# Altium PCB UM_10.PcbDoc (part 1 of 3)
Units mil, origin at the board's own origin, x right, y up, seen from the top; angles counter-clockwise.
Board outline 3937.01 x 3937.01 mil, 4 copper layers (Top, GND_02, PWR_03, Bottom), stack 35.4 mil thick; 347 components, 178 nets, 1059 pads, 909 vias.
Unrouted connection lines stored in the file: 2.
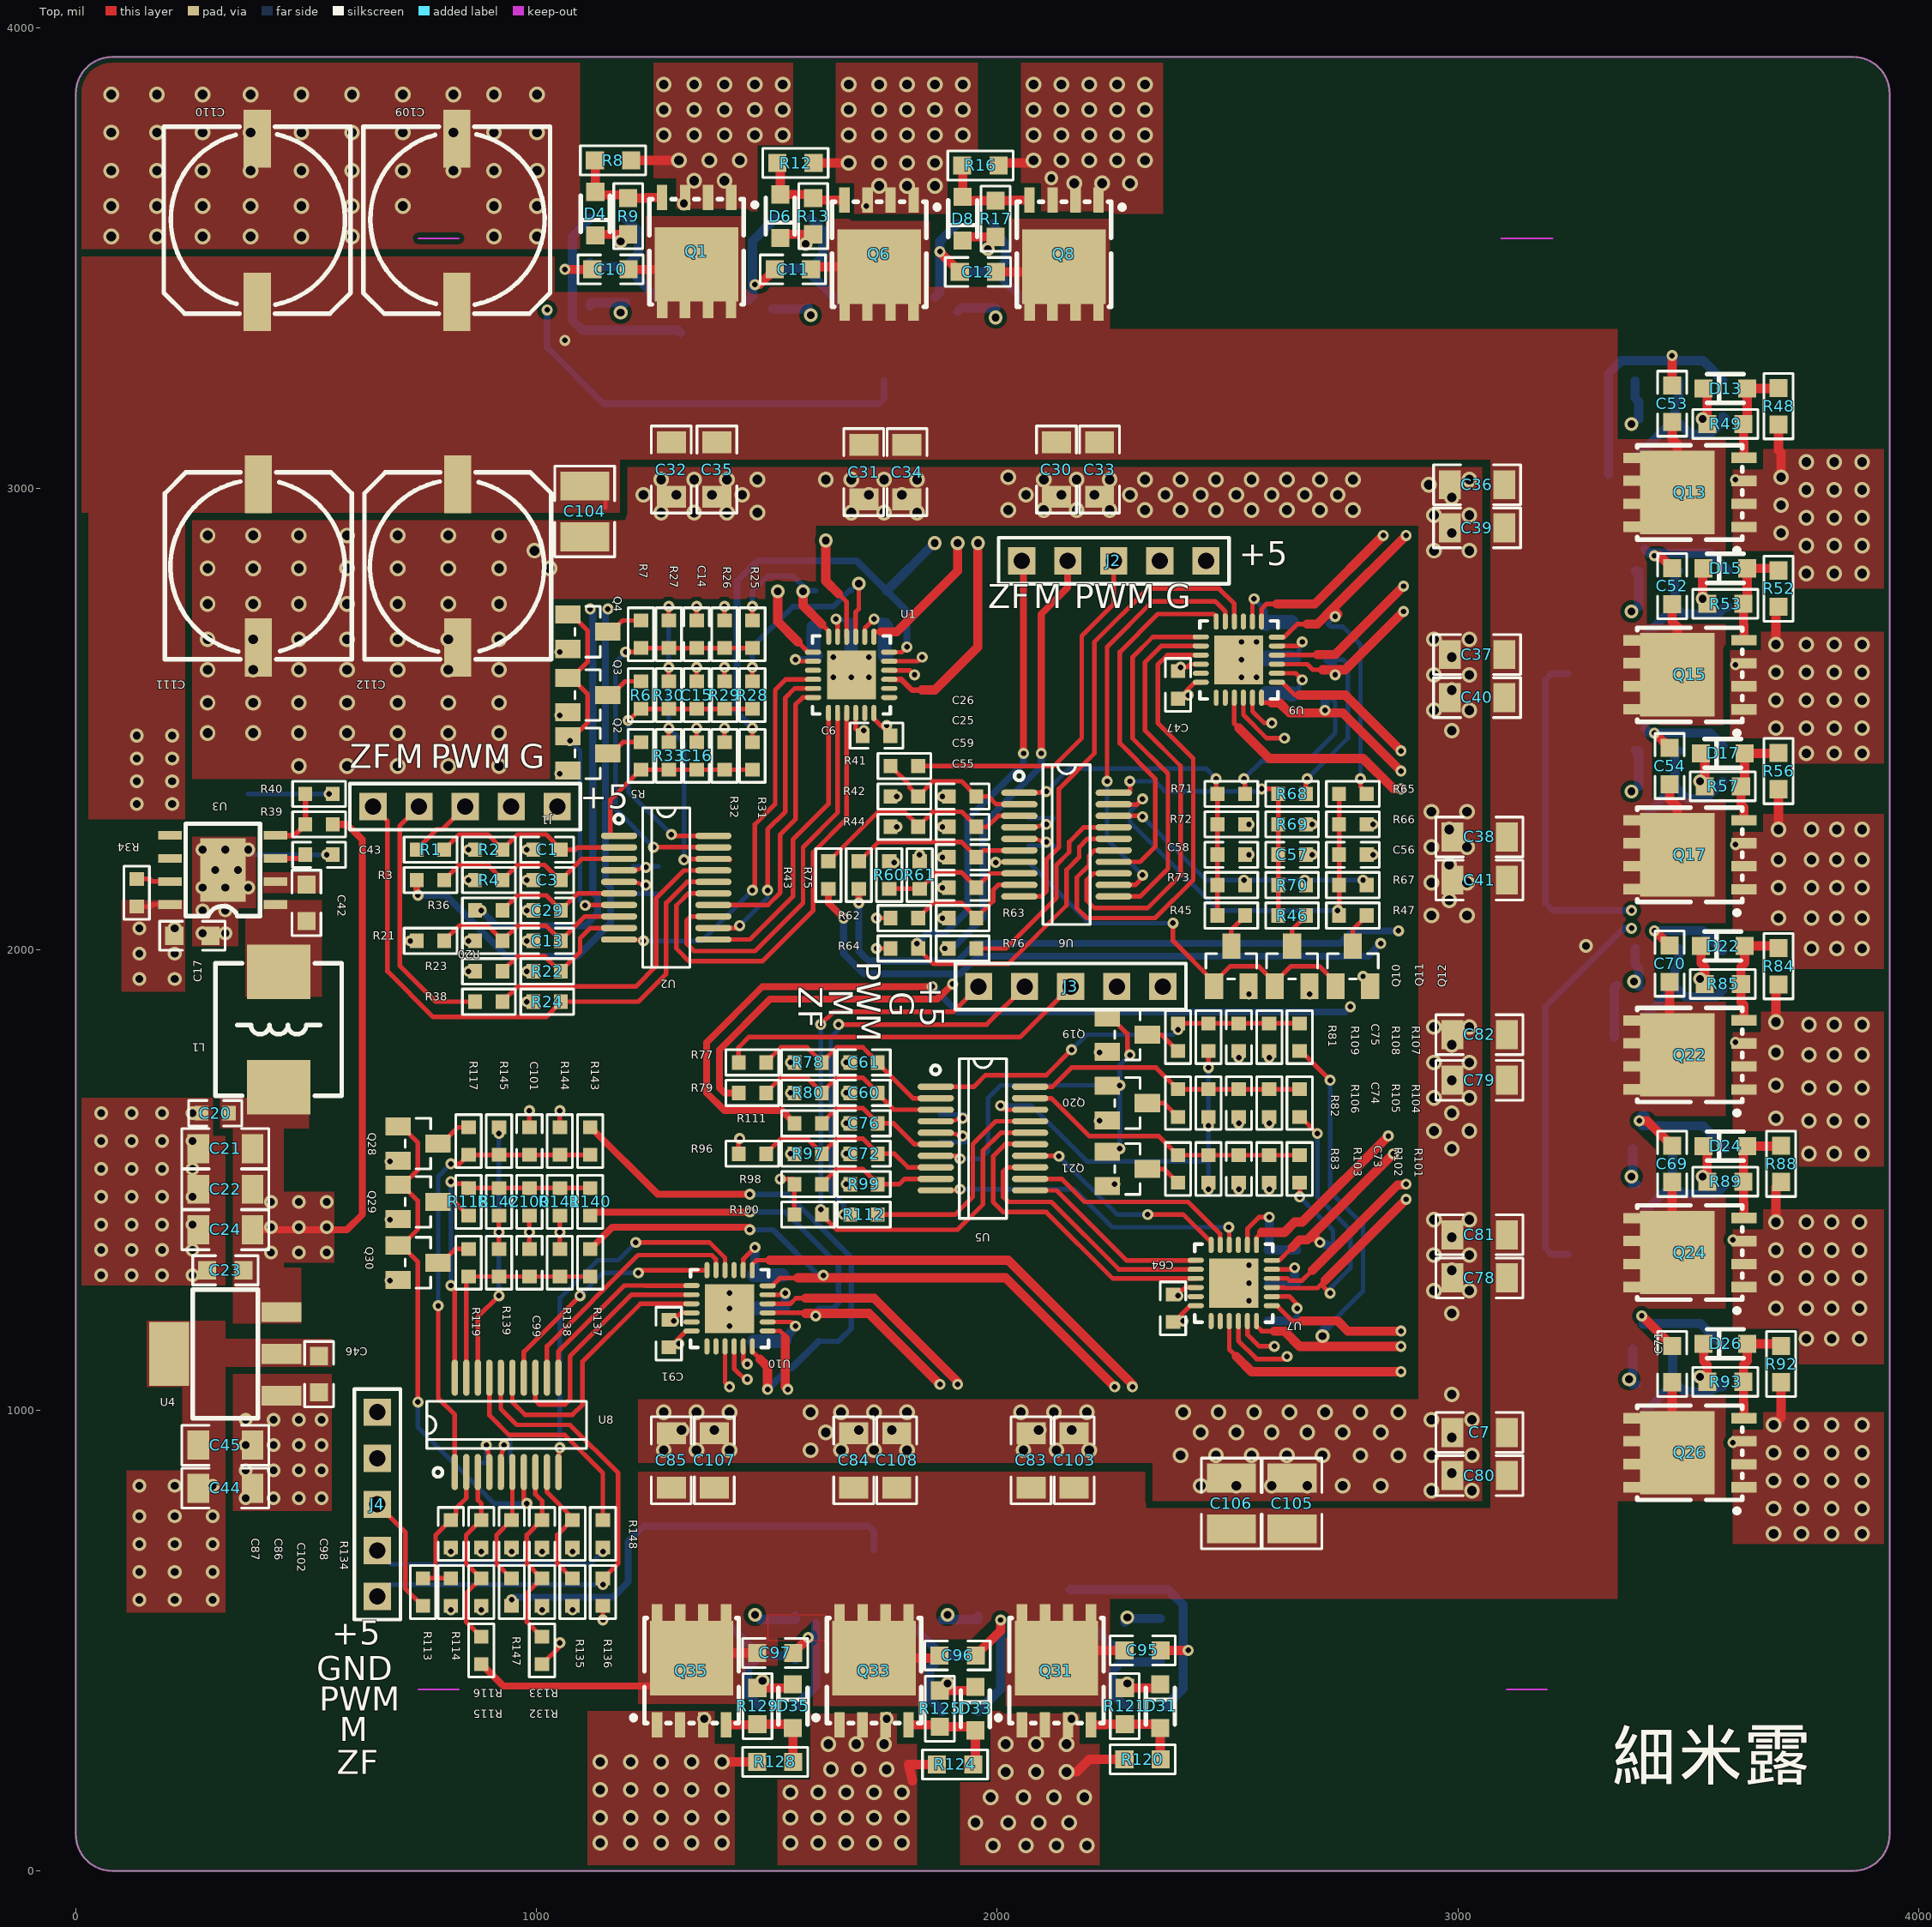
[diagram p0: Top view]
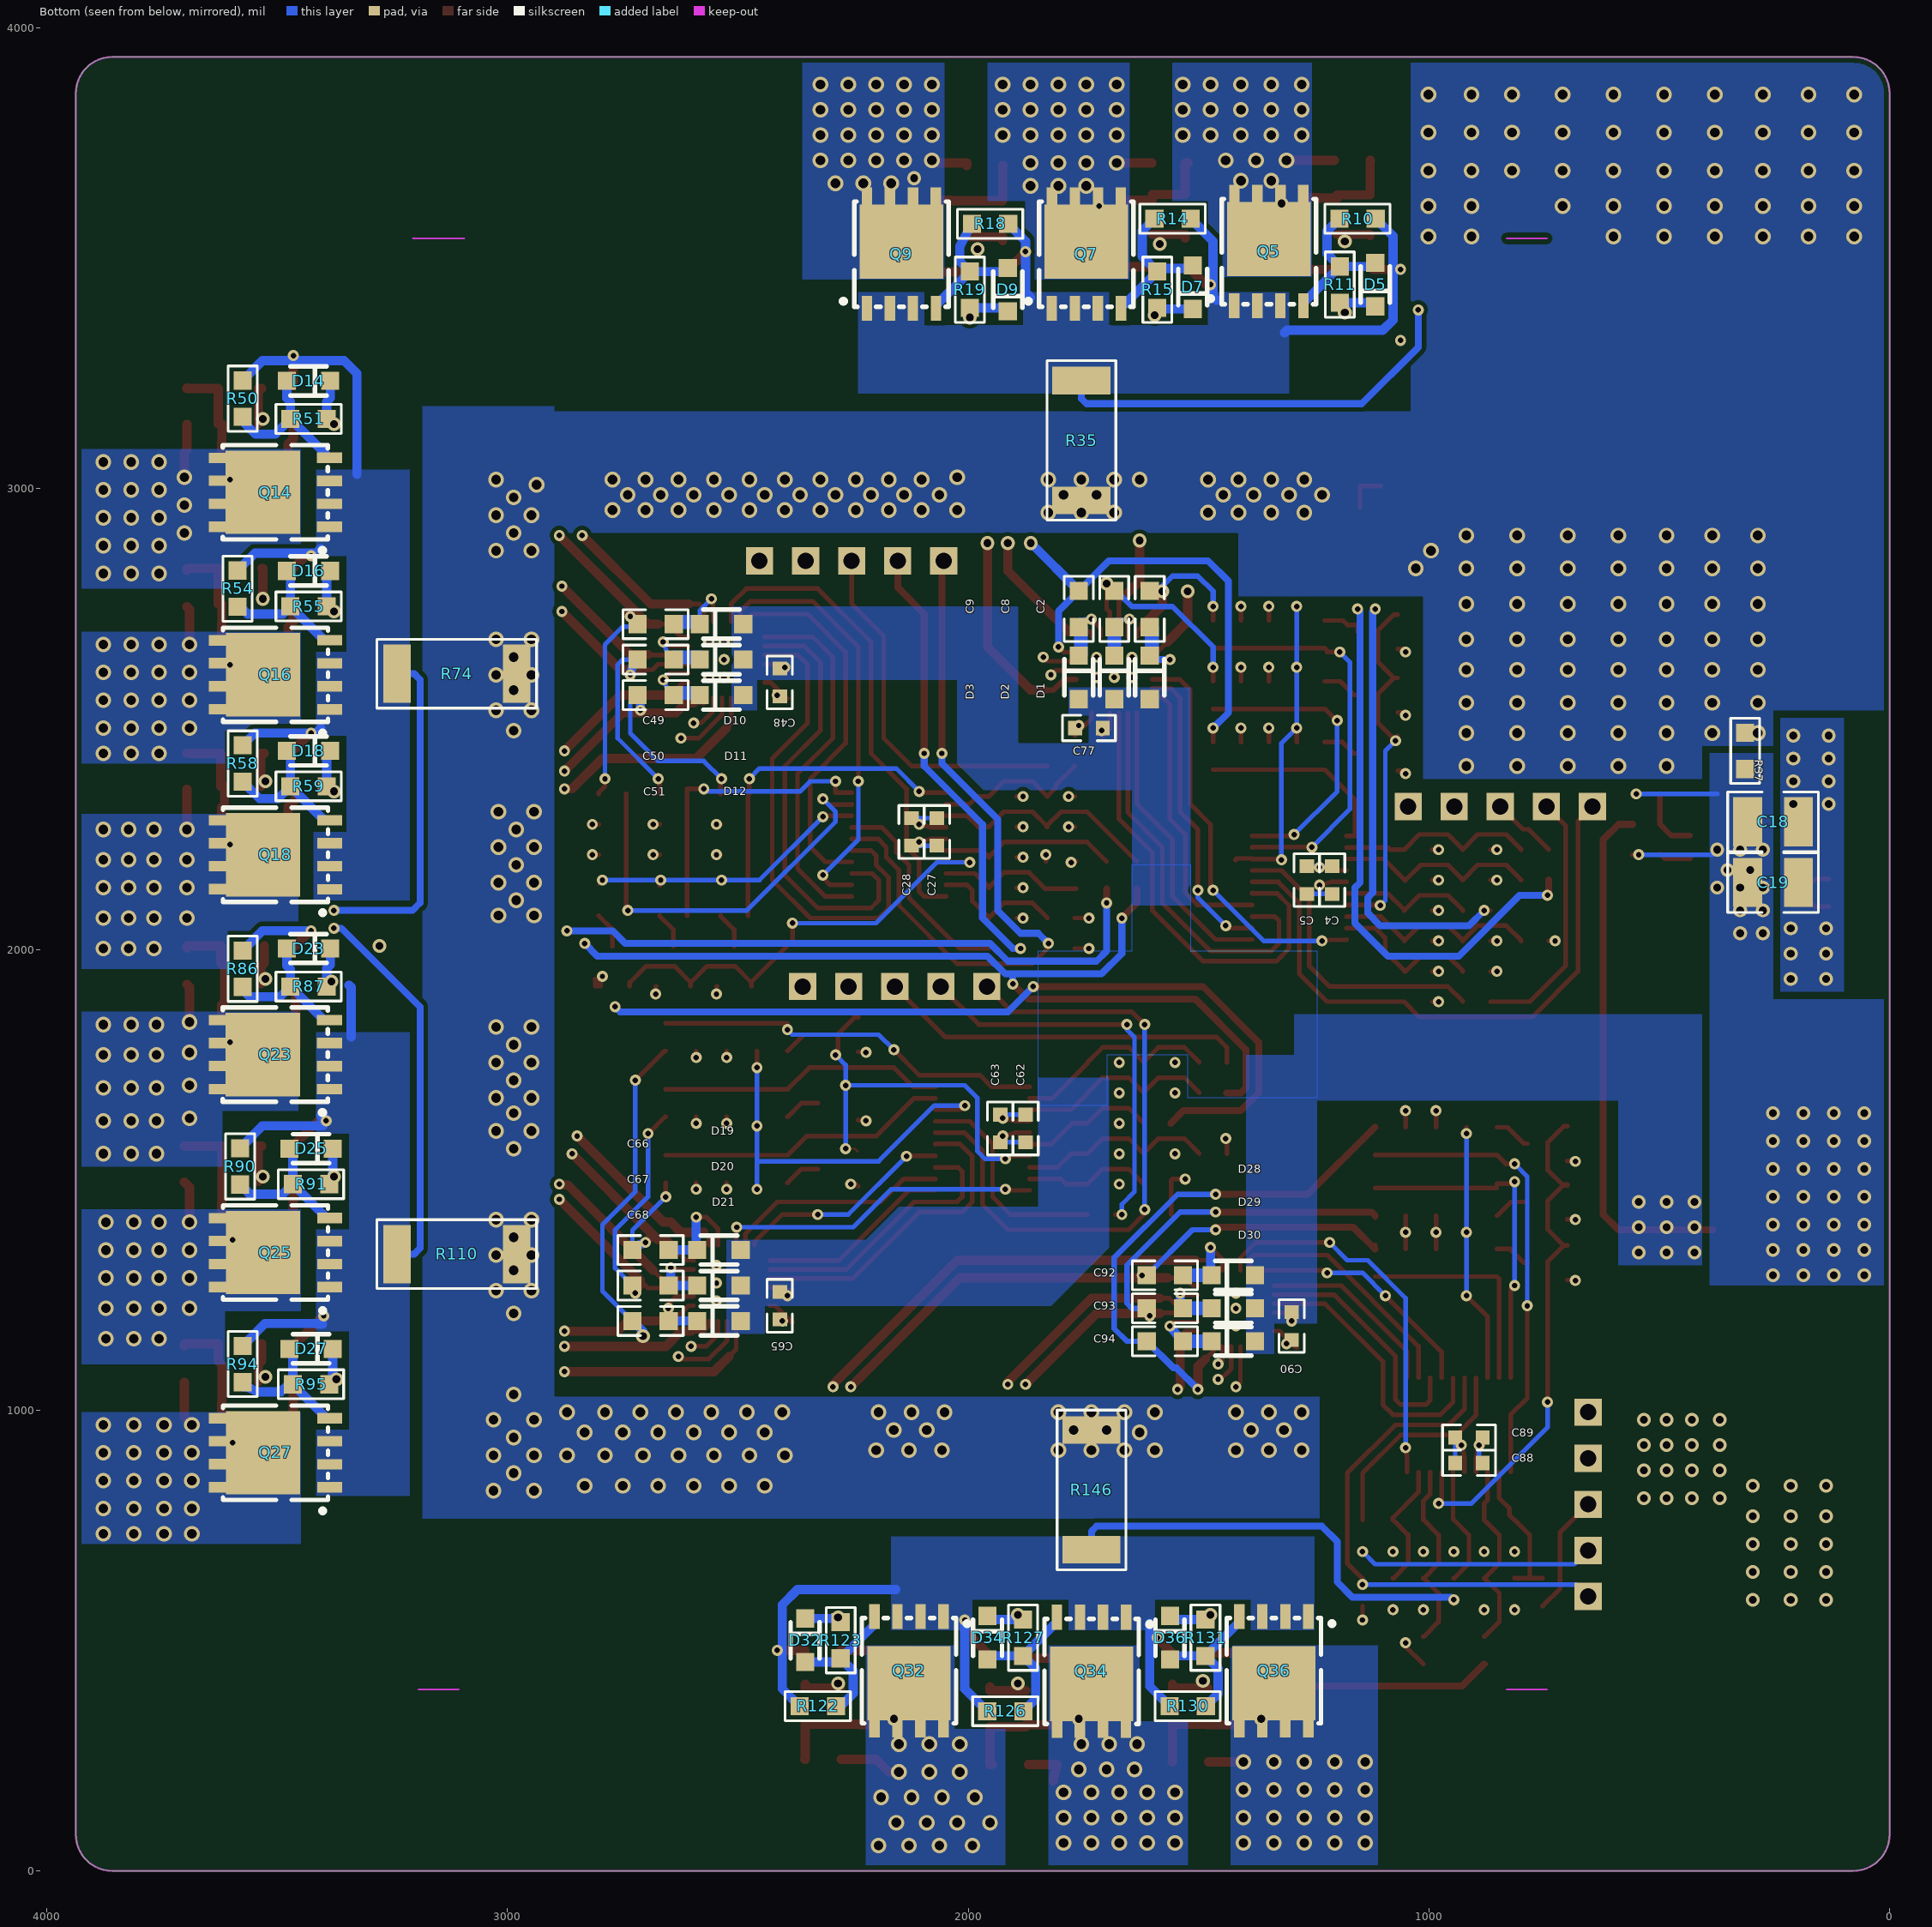
[diagram p1: Bottom view, seen from below]
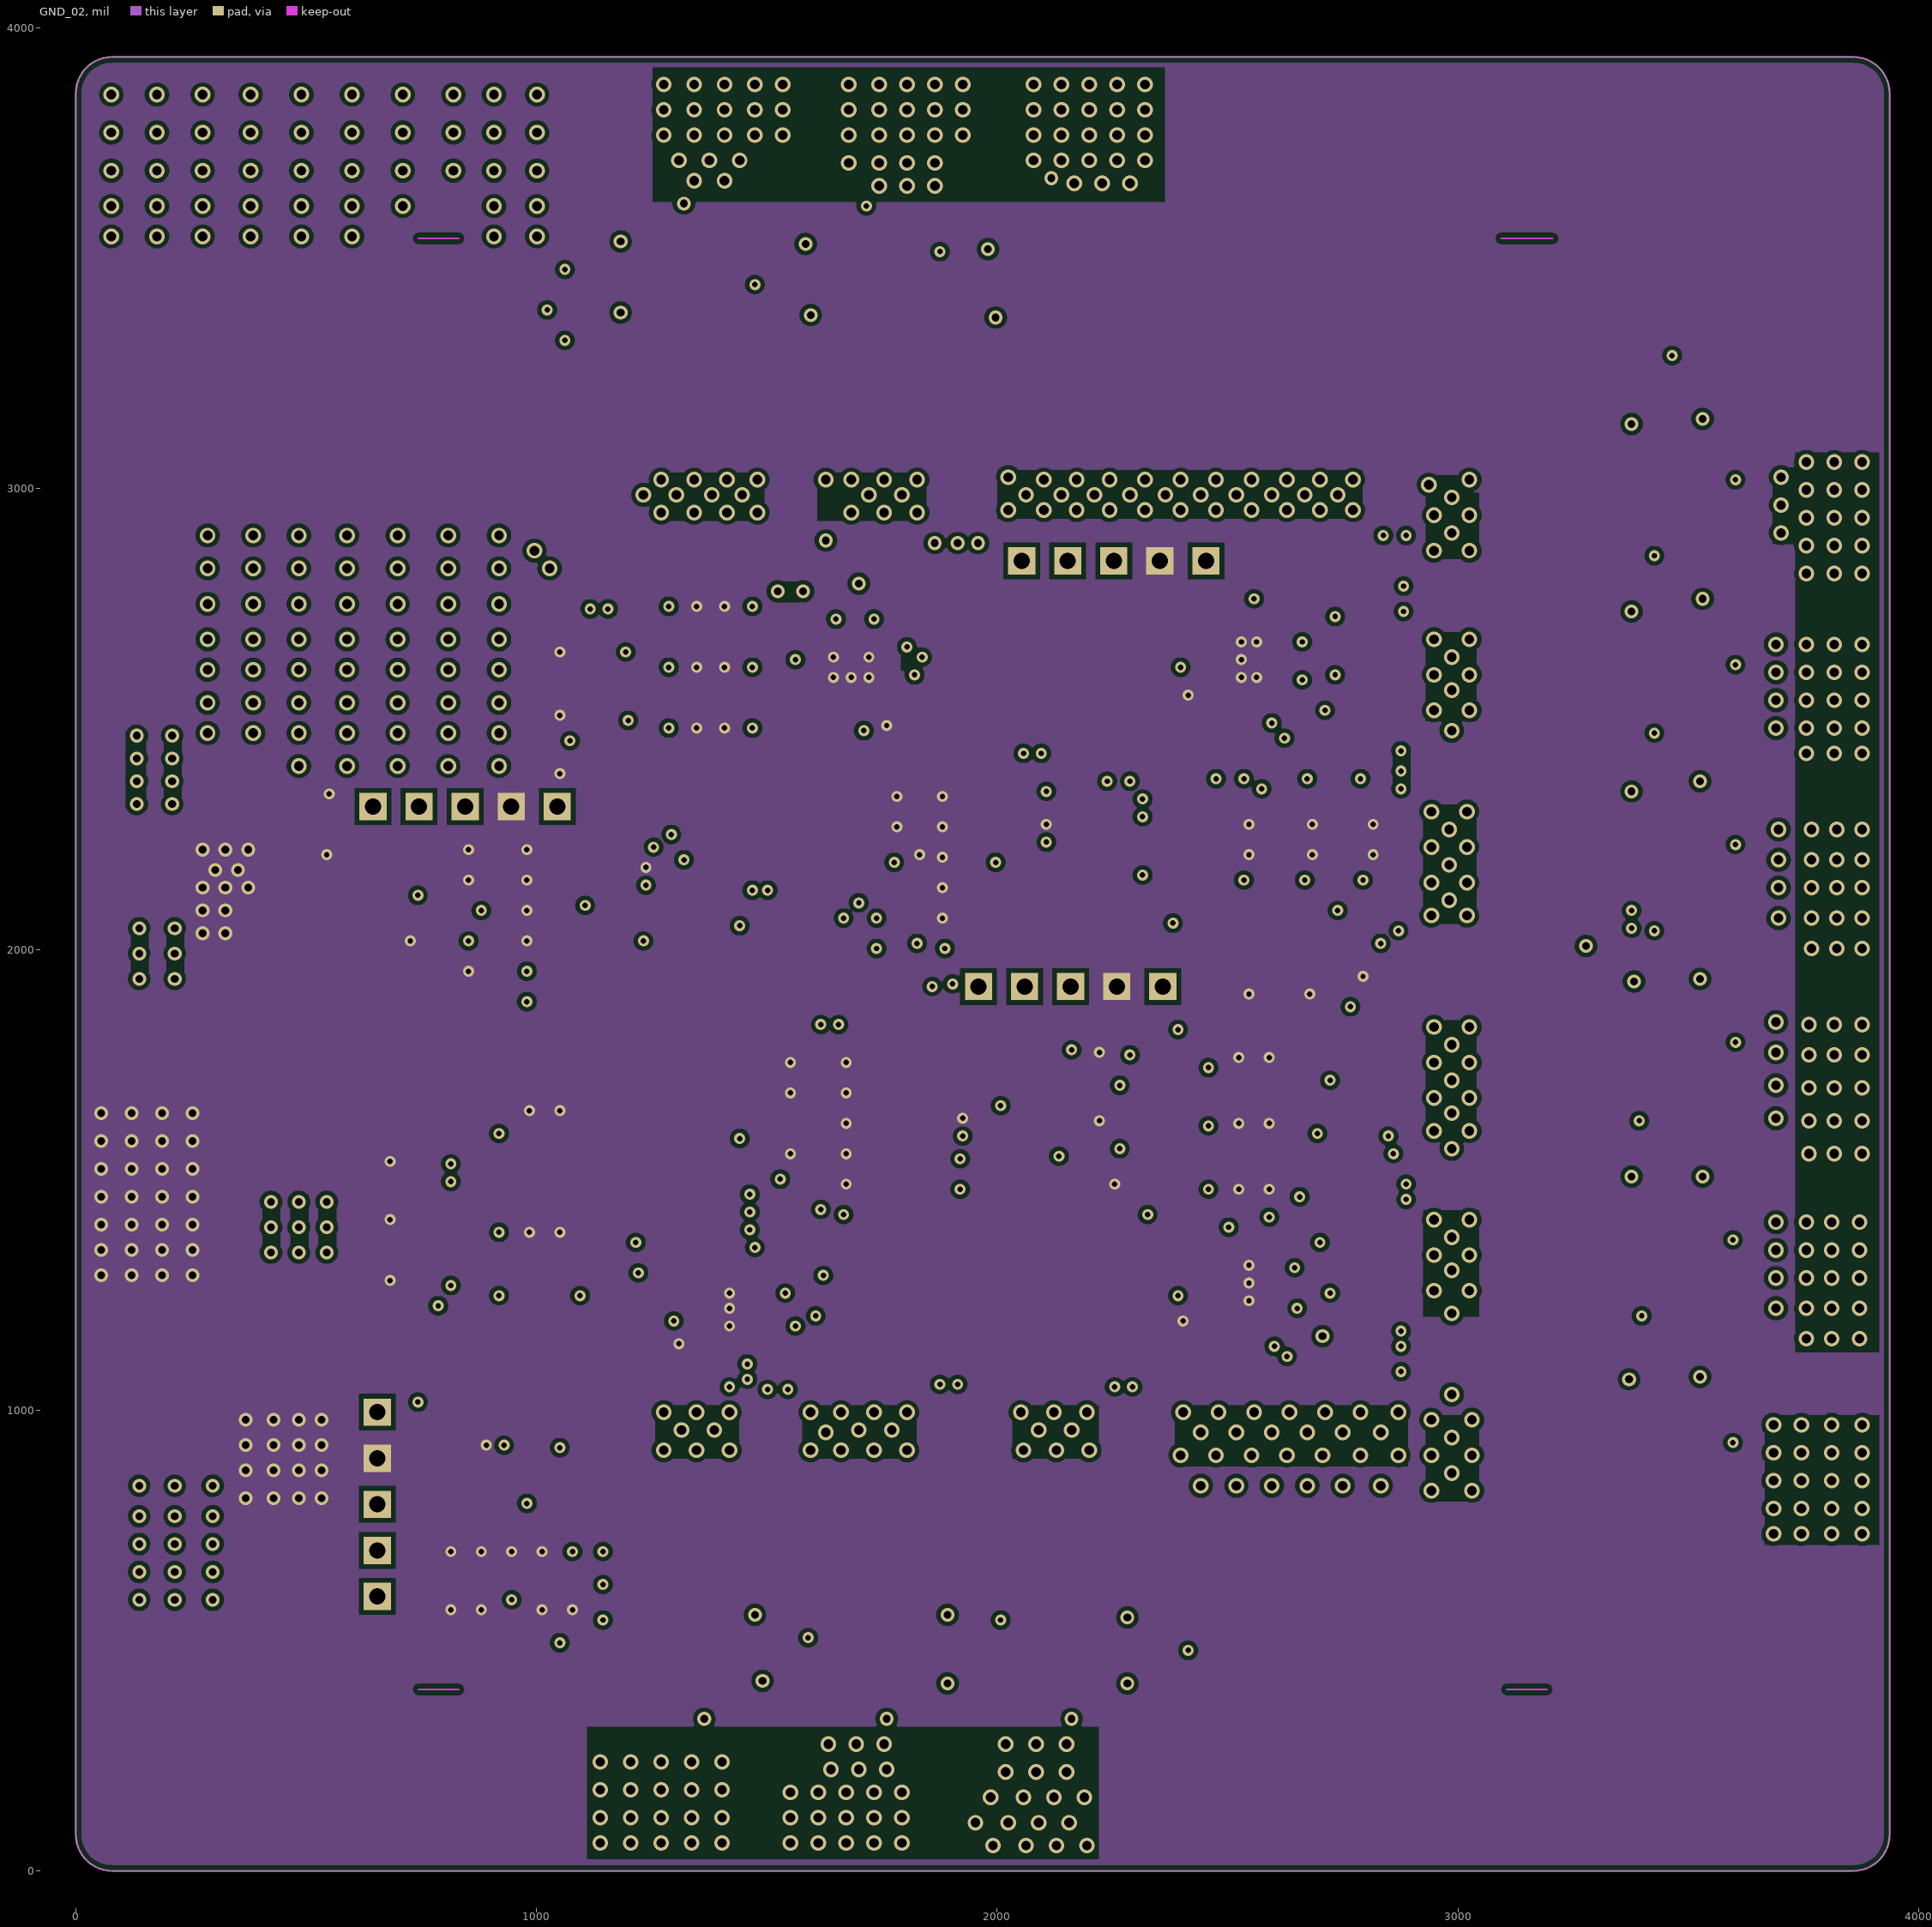
[diagram p2: GND_02]
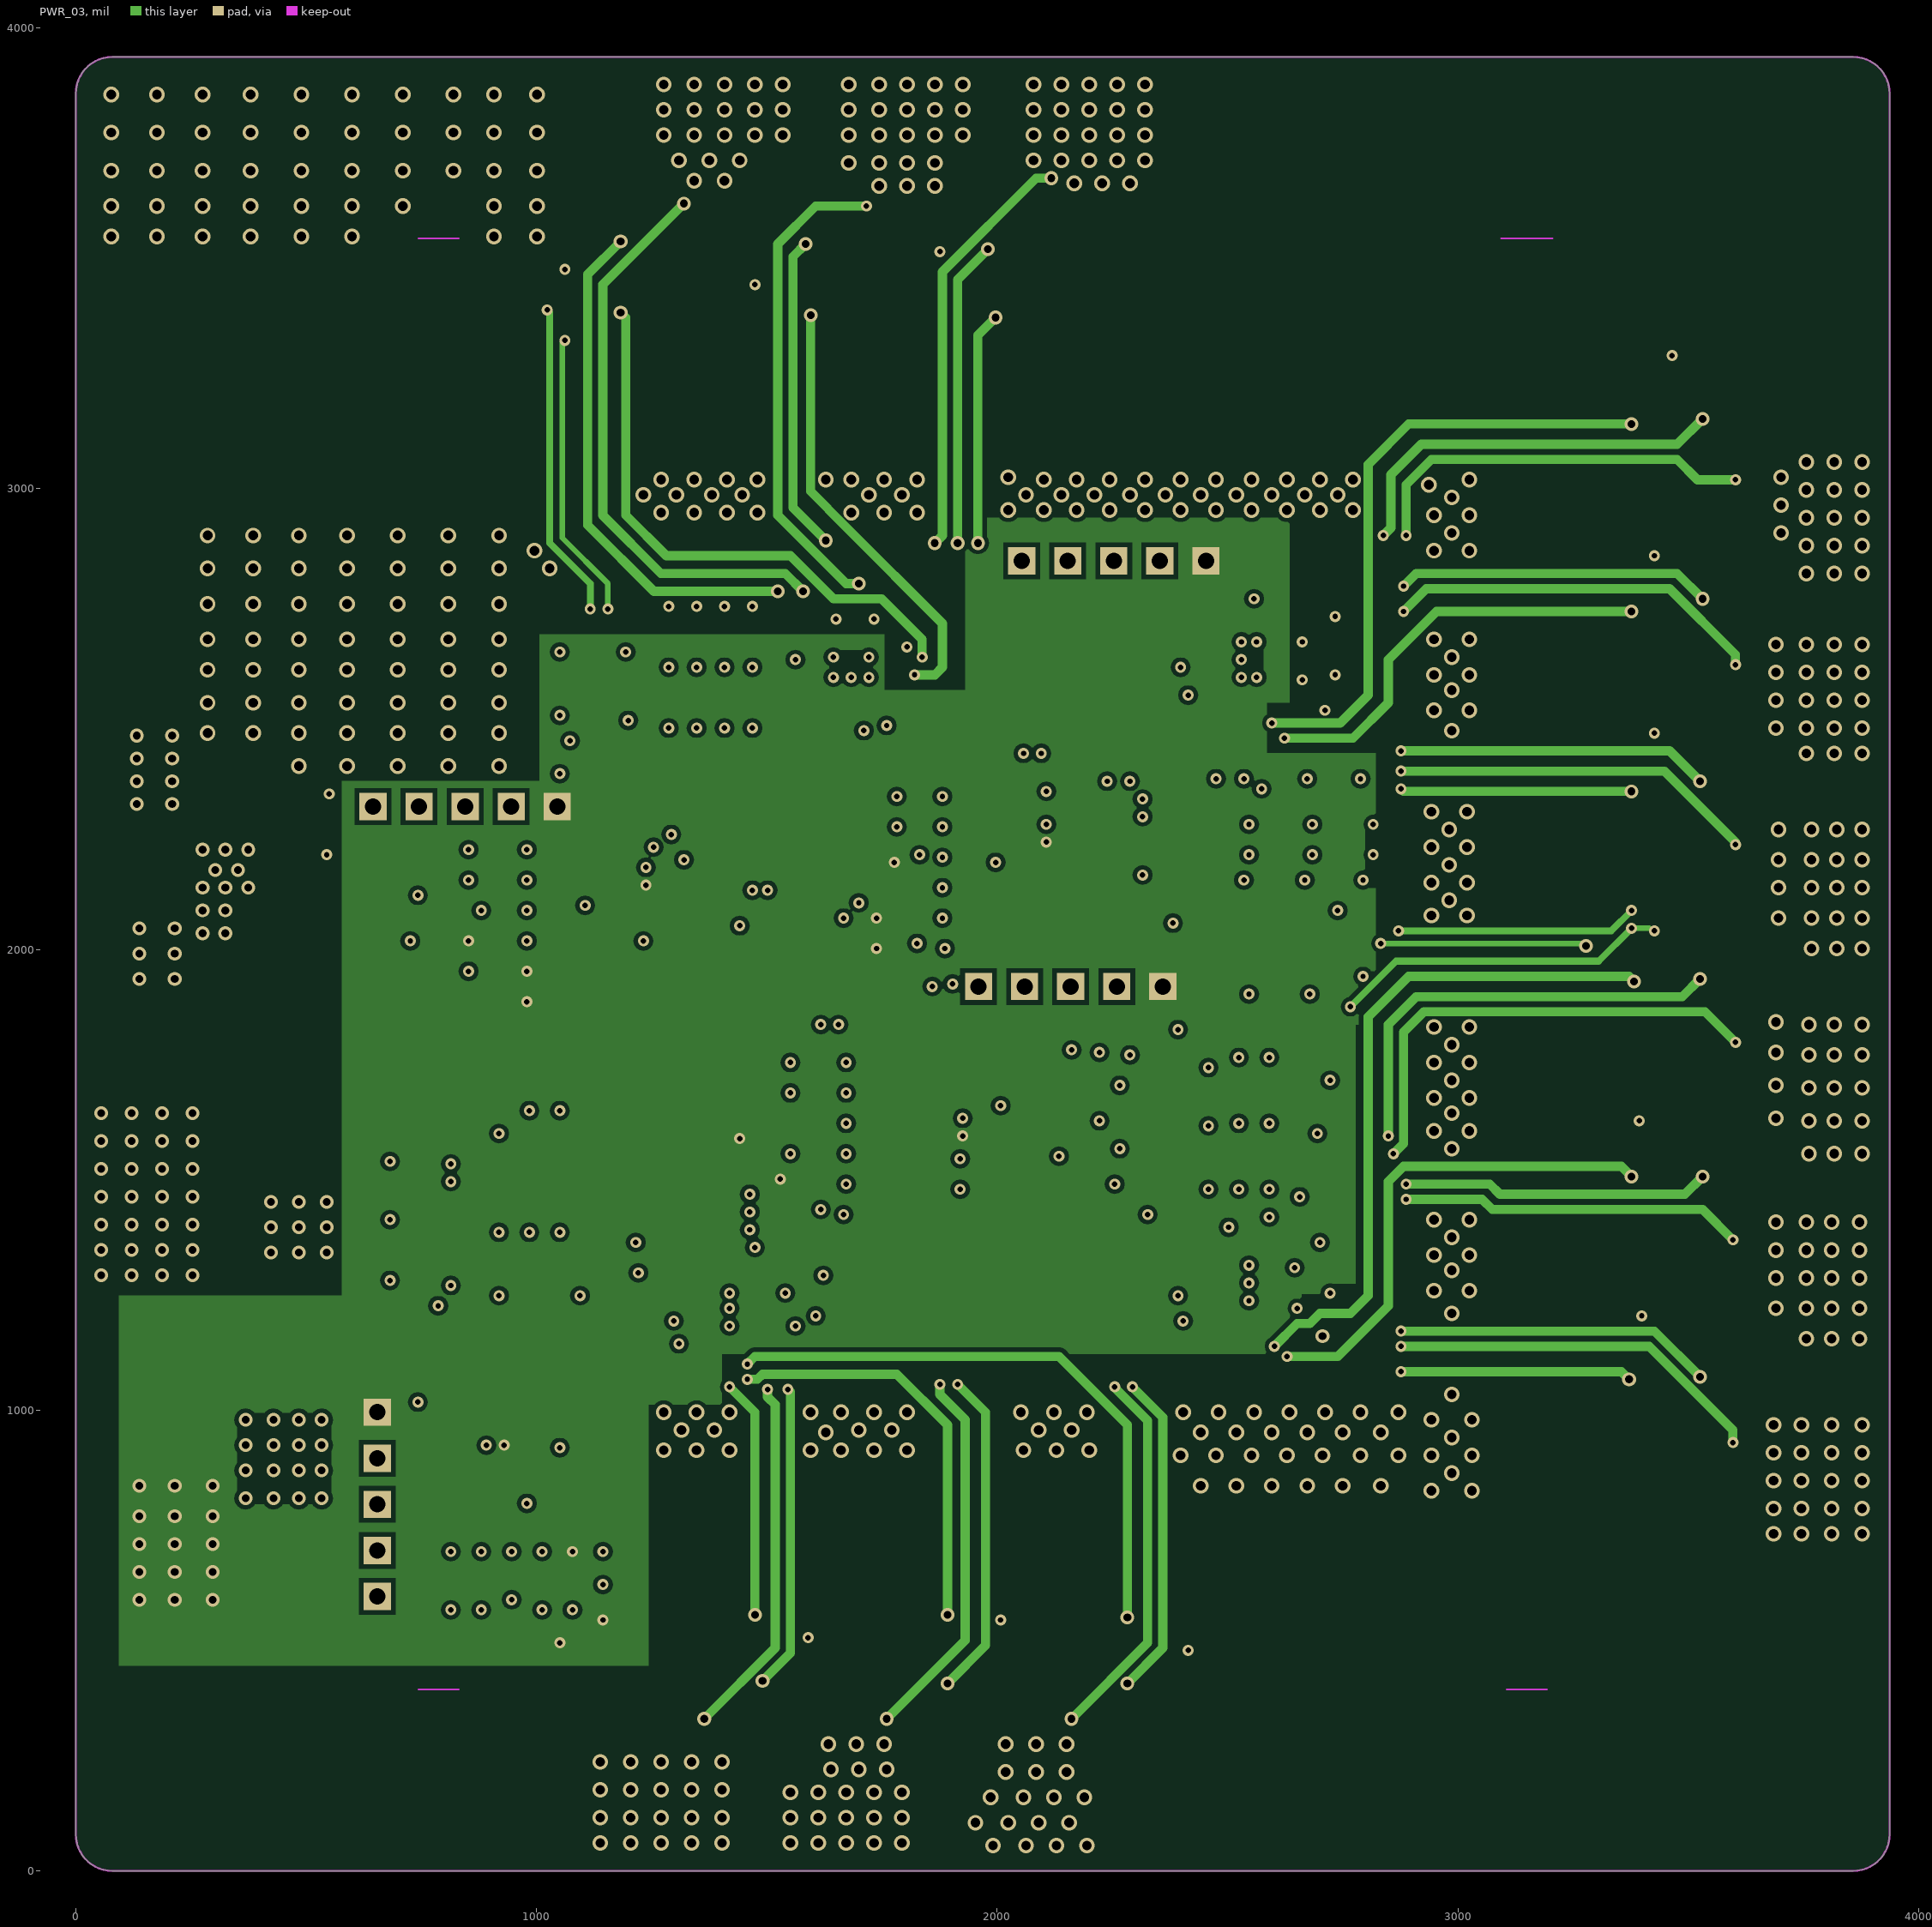
[diagram p3: PWR_03]

## Layer stack, top to bottom
Solder Mask Top: solder mask 0.4, Solder Resist, Dk 3.5
Top: signal copper 1.35
Dielectric 1: dielectric 10, FR-4, Dk 4.3
GND_02: signal copper 1.35
Dielectric2: dielectric 10, FR-4, Dk 4.3
PWR_03: signal copper 1.35
Dielectric3: dielectric 10, FR-4, Dk 4.3
Bottom: signal copper 1.35
Solder Mask Bottom: solder mask 0.4, Solder Resist, Dk 3.5

## Board outline
0,78.74 ccw(c78.74,78.74) 78.74,0 3858.27,0 ccw(c3858.27,78.74) 3937.01,78.74 3937.01,3858.27 ccw(c3858.27,3858.27) 3858.27,3937.01 78.74,3937.01 ccw(c78.74,3858.27) 0,3858.27

## Design rules (kind name [scope] priority, off if disabled: settings)
Clearance "Clearance - Default - DEFAULT- SMD" [IsVia vs IsSMTPin] p1: gap=0 ignorepadtopadclearanceinfootprint=FALSE
Clearance "Clearance - Default - DEFAULT - Via" [IsVia vs IsVia] p2: gap=0 ignorepadtopadclearanceinfootprint=FALSE
Clearance "Clearance - Default - DEFAULT - Net" [All] p3: gap=6 ignorepadtopadclearanceinfootprint=FALSE except(0: Arc-Hole Track-Hole SMDPad-Hole THPad-Hole Via-Hole Fill-Hole Poly-Hole Region-Hole Text-Hole; 9: Via-Fill Via-Poly Via-Region; 10: Arc-Fill Arc-Poly Arc-Region Track-Fill Track-Poly Track-Region SMDPad-Fill SMDPad-Poly SMDPad-Region THPad-Fill THPad-Poly THPad-Region Text-Text; 16: Fill-Fill Fill-Poly Fill-Region Poly-Poly Poly-Region Region-Region)
ComponentClearance "ComponentClearance - Default - DEFAULT" [All] p1: gap=0 collisioncheckmode=3 verticalgap=10 showdistances=FALSE
FanoutControl Fanout_Small [(CompPinCount < 5)] p2: bgadir=Out bgaviamode=Centered fanoutstyle=Auto fanoutdirection=OutThenIn viagrid=1 // Fanout_Small (Default Rule)
FanoutControl Fanout_LCC [IsLCC] p3: bgadir=Out bgaviamode=Centered fanoutstyle=Auto fanoutdirection=Alternating viagrid=1 // Fanout_LCC (Default Rule)
FanoutControl Fanout_SOIC [IsSOIC] p4: bgadir=Out bgaviamode=Centered fanoutstyle=Auto fanoutdirection=Alternating viagrid=1 // Fanout_SOIC (Default Rule)
HoleToHoleClearance "HoleToHoleClearance - Default - DEFAULT" [All] p1: gap=0 allowstackedmicrovias=TRUE
Length "Default Length" [All] p1: maxlimit=50000 minlimit=0
MaxMinImpedance "Default Impedance" [All] p1: minimum=50.00 maximum=150.0
ParallelSegment "Default Parallel Segment Adjasent" [All] p1: limit=1000 gap=200
ParallelSegment "Default Parallel Segment Same Layer" [All] p2: limit=1000 gap=200
PlaneConnect "Default PlaneConnect" [All] p1: planeconnectstyle=Direct reliefexpansion=20 reliefentries=4 reliefconductorwidth=15 reliefairgap=10
PolygonConnect "PolygonConnect - Default SMT" [IsSMTPin] p1: connectstyle=Direct reliefconductorwidth=10 reliefentries=4 polygonreliefangle="45 Angle" airgapwidth=10
PolygonConnect "PolygonConnect - Default Pad" [All] p2: connectstyle=Direct reliefconductorwidth=15 reliefentries=4 polygonreliefangle="45 Angle" airgapwidth=10
RoutingLayers "RoutingLayers - Default - DEFAULT" [All] p1: top layer_v5=TRUE mid layer 1_v5=TRUE mid layer 2_v5=TRUE bottom layer_v5=TRUE
RoutingPriority "RoutingPriority - Default - DEFAULT" [All] p1: routingpriority=3
RoutingTopology "RoutingTopology - Net - VCC_5.0V" [InNet('VCC_5.0V') vs InNet('VCC_5.0V')] p1: topology=Shortest
RoutingTopology "Default Routing Topology" [All] p2: topology=Shortest
RoutingVias "RoutingVias - Default - DEFAULT" [All] p1: holewidth=12 width=24 viastyle="Through Hole" minholewidth=12 minwidth=24 maxholewidth=12 maxwidth=24
SMDToCorner "SMDToCorner - Default - DEFAULT" [All] p1: distance=0
SolderMaskExpansion "SolderMaskExpansion from CAM settings" [All] p1: expansion=5 istentingtop=FALSE
Width "Default Width" [All] p1: maxlimit=200 minlimit=4 preferedwidth=10
21 further rules are at their usual default settings.

## Components (designator, comment, footprint, x,y, rotation, side; value= is the part's Value field where it differs from the comment)
C1 "0603C" 0603C 1023,2216.5 r180 top
C2 "0805C" 0805C 1606,2739 r90 bottom
C3 "0603C" 0603C 1023,2150.5 r180 top
C4 "0603C" 0603C 1210,2150.5 r90 bottom
C5 "0603C" 0603C 1265,2150.5 r90 bottom
C6 "0603C" 0603C 1738,2464 r0 top
C7 "1206C" 1206C 3047,951.5 r180 top
C8 "0805C" 0805C 1683,2739 r90 bottom
C9 "0805C" 0805C 1760,2739 r90 bottom
C10 "0805C" 0805C 1160.5,3476 r180 top
C11 "0805C" 0805C 1556.5,3476 r180 top
C12 "0805C" 0805C 1958,3470.5 r180 top
C13 "0603C" 0603C 1023,2018.5 r180 top
C14 "0603C" 0603C 1347.5,2684 r90 top
C15 "0603C" 0603C 1347.5,2552 r90 top
C16 "0603C" 0603C 1347.5,2420 r90 top
C17 "0805C" 0805C 253,2029.5 r0 top
C18 "1210C" 1210C 253,2277 r0 bottom
C19 "1210C" 1210C 253,2145 r0 bottom
C20 "0603C" 0603C 302.5,1644.5 r180 top
C21 "1206C" 1206C 324.5,1567.5 r180 top
C22 "1206C" 1206C 324.5,1479.5 r180 top
C23 "0805C" 0805C 324.5,1303.5 r180 top
C24 "1206C" 1206C 324.5,1391.5 r180 top
C25 "0603C" 0603C 1925,2266 r180 top
C26 "0603C" 0603C 1925,2332 r180 top
C27 "0603C" 0603C 2068,2255 r90 bottom
C28 "0603C" 0603C 2123,2255 r90 bottom
C29 "0603C" 0603C 1023,2084.5 r180 top
C30 "1206C" 1206C 2128.5,3041.5 r270 top
C31 "1206C" 1206C 1710.5,3036 r270 top
C32 "1206C" 1206C 1292.5,3041.5 r270 top
C33 "1206C" 1206C 2222,3041.5 r270 top
C34 "1206C" 1206C 1804,3036 r270 top
C35 "1206C" 1206C 1391.5,3041.5 r270 top
C36 "1206C" 1206C 3041.5,3008.5 r180 top
C37 "1206C" 1206C 3041.5,2640 r180 top
C38 "1206C" 1206C 3047,2244 r180 top
C39 "1206C" 1206C 3041.5,2915 r180 top
C40 "1206C" 1206C 3041.5,2546.5 r180 top
C41 "1206C" 1206C 3047,2150.5 r180 top
C42 "0805C" 0805C 500.5,2101 r270 top
C43 "0603C" 0603C 528,2205.5 r180 top
C44 "1206C" 1206C 324.5,830.5 r0 top
C45 "1206C" 1206C 324.5,924 r0 top
C46 "0805C" 0805C 528,1078 r270 top
C47 "0603C" 0603C 2392.5,2574 r270 top
C48 "0603C" 0603C 2409,2579.5 r270 bottom
C49 "0805C" 0805C 2678.5,2706 r0 bottom
C50 "0805C" 0805C 2678.5,2629 r0 bottom
C51 "0805C" 0805C 2678.5,2552 r0 bottom
C52 "0805C" 0805C 3465,2788.5 r90 top
C53 "0805C" 0805C 3465,3184.5 r90 top
C54 "0805C" 0805C 3459.5,2398 r90 top
C55 "0603C" 0603C 1925,2134 r180 top
C56 "0603C" 0603C 2772,2205.5 r0 top
C57 "0603C" 0603C 2640,2205.5 r0 top
C58 "0603C" 0603C 2508,2205.5 r0 top
C59 "0603C" 0603C 1925,2200 r180 top
C60 "0603C" 0603C 1710.5,1688.5 r180 top
C61 "0603C" 0603C 1710.5,1754.5 r180 top
C62 "0603C" 0603C 1875.5,1611.5 r90 bottom
C63 "0603C" 0603C 1930.5,1611.5 r90 bottom
C64 "0603C" 0603C 2381.5,1221 r270 top
C65 "0603C" 0603C 2409,1226.5 r270 bottom
C66 "0805C" 0805C 2689.5,1347.5 r0 bottom
C67 "0805C" 0805C 2689.5,1270.5 r0 bottom
C68 "0805C" 0805C 2689.5,1193.5 r0 bottom
C69 "0805C" 0805C 3465,1534.5 r90 top
C70 "0805C" 0805C 3459.5,1969 r90 top
C71 "0805C" 0805C 3465,1100 r90 top
C72 "0603C" 0603C 1710.5,1556.5 r180 top
C73 "0603C" 0603C 2524.5,1523.5 r270 top
C74 "0603C" 0603C 2524.5,1666.5 r270 top
C75 "0603C" 0603C 2524.5,1809.5 r270 top
C76 "0603C" 0603C 1710.5,1622.5 r180 top
C77 "0603C" 0603C 1738,2480.5 r0 bottom
C78 "1206C" 1206C 3047,1287 r180 top
C79 "1206C" 1206C 3047,1716 r180 top
C80 "1206C" 1206C 3047,858 r180 top
C81 "1206C" 1206C 3047,1380.5 r180 top
C82 "1206C" 1206C 3047,1815 r180 top
C83 "1206C" 1206C 2073.5,891 r90 top
C84 "1206C" 1206C 1688.5,891 r90 top
C85 "1206C" 1206C 1292.5,891 r90 top
C86 "0603C" 0603C 880,731.5 r270 top
C87 "0603C" 0603C 814,731.5 r270 top
C88 "0603C" 0603C 913,885.5 r180 bottom
C89 "0603C" 0603C 913,940.5 r180 bottom
C90 "0603C" 0603C 1298,1182.5 r270 bottom
C91 "0603C" 0603C 1287,1166 r270 top
C92 "0805C" 0805C 1573,1292.5 r0 bottom
C93 "0805C" 0805C 1573,1221 r0 bottom
C94 "0805C" 0805C 1573,1149.5 r0 bottom
C95 "0805C" 0805C 2315.5,478.5 r0 top
C96 "0805C" 0805C 1914,467.5 r0 top
C97 "0805C" 0805C 1518,473 r0 top
C98 "0603C" 0603C 1012,731.5 r270 top
C99 "0603C" 0603C 984.5,1320 r90 top
C100 "0603C" 0603C 984.5,1452 r270 top
C101 "0603C" 0603C 984.5,1584 r90 top
C102 "0603C" 0603C 946,731.5 r270 top
C103 "1206C" 1206C 2167,891 r90 top
C104 "1210C" 1210C 1104.66,2950.61 r270 top
C105 "1210C" 1210C 2640,797.5 r90 top
C106 "1210C" 1210C 2508,797.5 r90 top
C107 "1206C" 1206C 1386,891 r90 top
C108 "1206C" 1206C 1782,891 r90 top
C109 "CAP-SMD_BD10.0-L10.3-W10.3-FD" CAP-SMD_BD10.0-L10.3-W10.3-FD 826.77,3582.68 r90 top
C110 "CAP-SMD_BD10.0-L10.3-W10.3-FD" CAP-SMD_BD10.0-L10.3-W10.3-FD 393.7,3582.68 r90 top
C111 "CAP-SMD_BD10.0-L10.3-W10.3-FD" CAP-SMD_BD10.0-L10.3-W10.3-FD 396,2832.5 r270 top
C112 "CAP-SMD_BD10.0-L10.3-W10.3-FD" CAP-SMD_BD10.0-L10.3-W10.3-FD 829.07,2832.5 r270 top
D1 "SOD-323_L1.8-W1.3-LS2.5-RD" SOD-323_L1.8-W1.3-LS2.5-RD 1606,2590.5 r270 bottom
D2 "SOD-323_L1.8-W1.3-LS2.5-RD" SOD-323_L1.8-W1.3-LS2.5-RD 1683,2590.5 r270 bottom
D3 "SOD-323_L1.8-W1.3-LS2.5-RD" SOD-323_L1.8-W1.3-LS2.5-RD 1760,2590.5 r270 bottom
D4 "SOD-323_L1.8-W1.3-LS2.5-RD" SOD-323_L1.8-W1.3-LS2.5-RD 1127.5,3597 r90 top
D5 "SOD-323_L1.8-W1.3-LS2.5-RD" SOD-323_L1.8-W1.3-LS2.5-RD 1116.5,3443 r90 bottom
D6 "SOD-323_L1.8-W1.3-LS2.5-RD" SOD-323_L1.8-W1.3-LS2.5-RD 1529,3591.5 r90 top
D7 "SOD-323_L1.8-W1.3-LS2.5-RD" SOD-323_L1.8-W1.3-LS2.5-RD 1512.5,3437.5 r90 bottom
D8 "SOD-323_L1.8-W1.3-LS2.5-RD" SOD-323_L1.8-W1.3-LS2.5-RD 1925,3586 r90 top
D9 "SOD-323_L1.8-W1.3-LS2.5-RD" SOD-323_L1.8-W1.3-LS2.5-RD 1914,3432 r90 bottom
D10 "SOD-323_L1.8-W1.3-LS2.5-RD" SOD-323_L1.8-W1.3-LS2.5-RD 2535.5,2706 r180 bottom
D11 "SOD-323_L1.8-W1.3-LS2.5-RD" SOD-323_L1.8-W1.3-LS2.5-RD 2535.5,2629 r180 bottom
D12 "SOD-323_L1.8-W1.3-LS2.5-RD" SOD-323_L1.8-W1.3-LS2.5-RD 2535.5,2552 r180 bottom
D13 "SOD-323_L1.8-W1.3-LS2.5-RD" SOD-323_L1.8-W1.3-LS2.5-RD 3580.5,3217.5 r0 top
D14 "SOD-323_L1.8-W1.3-LS2.5-RD" SOD-323_L1.8-W1.3-LS2.5-RD 3432,3234 r0 bottom
D15 "SOD-323_L1.8-W1.3-LS2.5-RD" SOD-323_L1.8-W1.3-LS2.5-RD 3580.5,2827 r0 top
D16 "SOD-323_L1.8-W1.3-LS2.5-RD" SOD-323_L1.8-W1.3-LS2.5-RD 3432,2821.5 r0 bottom
D17 "SOD-323_L1.8-W1.3-LS2.5-RD" SOD-323_L1.8-W1.3-LS2.5-RD 3575,2425.5 r0 top
D18 "SOD-323_L1.8-W1.3-LS2.5-RD" SOD-323_L1.8-W1.3-LS2.5-RD 3432,2431 r0 bottom
D19 "SOD-323_L1.8-W1.3-LS2.5-RD" SOD-323_L1.8-W1.3-LS2.5-RD 2541,1347.5 r180 bottom
D20 "SOD-323_L1.8-W1.3-LS2.5-RD" SOD-323_L1.8-W1.3-LS2.5-RD 2541,1270.5 r180 bottom
D21 "SOD-323_L1.8-W1.3-LS2.5-RD" SOD-323_L1.8-W1.3-LS2.5-RD 2541,1193.5 r180 bottom
D22 "SOD-323_L1.8-W1.3-LS2.5-RD" SOD-323_L1.8-W1.3-LS2.5-RD 3575,2007.5 r0 top
D23 "SOD-323_L1.8-W1.3-LS2.5-RD" SOD-323_L1.8-W1.3-LS2.5-RD 3432,2002 r0 bottom
D24 "SOD-323_L1.8-W1.3-LS2.5-RD" SOD-323_L1.8-W1.3-LS2.5-RD 3580.5,1573 r0 top
D25 "SOD-323_L1.8-W1.3-LS2.5-RD" SOD-323_L1.8-W1.3-LS2.5-RD 3426.5,1567.5 r0 bottom
D26 "SOD-323_L1.8-W1.3-LS2.5-RD" SOD-323_L1.8-W1.3-LS2.5-RD 3580.5,1144 r0 top
D27 "SOD-323_L1.8-W1.3-LS2.5-RD" SOD-323_L1.8-W1.3-LS2.5-RD 3426.5,1133 r0 bottom
D28 "SOD-323_L1.8-W1.3-LS2.5-RD" SOD-323_L1.8-W1.3-LS2.5-RD 1424.5,1292.5 r180 bottom
D29 "SOD-323_L1.8-W1.3-LS2.5-RD" SOD-323_L1.8-W1.3-LS2.5-RD 1424.5,1221 r180 bottom
D30 "SOD-323_L1.8-W1.3-LS2.5-RD" SOD-323_L1.8-W1.3-LS2.5-RD 1424.5,1149.5 r180 bottom
D31 "SOD-323_L1.8-W1.3-LS2.5-RD" SOD-323_L1.8-W1.3-LS2.5-RD 2354,357.5 r270 top
D32 "SOD-323_L1.8-W1.3-LS2.5-RD" SOD-323_L1.8-W1.3-LS2.5-RD 2354,500.5 r270 bottom
D33 "SOD-323_L1.8-W1.3-LS2.5-RD" SOD-323_L1.8-W1.3-LS2.5-RD 1952.5,352 r270 top
D34 "SOD-323_L1.8-W1.3-LS2.5-RD" SOD-323_L1.8-W1.3-LS2.5-RD 1958,506 r270 bottom
D35 "SOD-323_L1.8-W1.3-LS2.5-RD" SOD-323_L1.8-W1.3-LS2.5-RD 1556.5,357.5 r270 top
D36 "SOD-323_L1.8-W1.3-LS2.5-RD" SOD-323_L1.8-W1.3-LS2.5-RD 1562,506 r270 bottom
J1 "HDR1X5" HDR1X5 1045,2310 r180 top
J2 "HDR1X5" HDR1X5 2453,2843.5 r180 top
J3 "HDR1X5" HDR1X5 2359.5,1919.5 r180 top
J4 "HDR1X5" HDR1X5 654.5,995.5 r270 top
L1 "L-SMD-0630" L-SMD-0630 440,1826 r270 top
Q1 "DFN-8_5X6" DFN-8_5X6 1347.5,3514.5 r180 top
Q2 "SOT23-3" SOT23-3 1111,2425.5 r270 top
Q3 "SOT23-3" SOT23-3 1111,2552 r270 top
Q4 "SOT23-3" SOT23-3 1111,2689.5 r270 top
Q5 "DFN-8_5X6" DFN-8_5X6 1347.5,3514.5 r180 bottom
Q6 "DFN-8_5X6" DFN-8_5X6 1743.5,3509 r180 top
Q7 "DFN-8_5X6" DFN-8_5X6 1743.5,3509 r180 bottom
Q8 "DFN-8_5X6" DFN-8_5X6 2145,3509 r180 top
Q9 "DFN-8_5X6" DFN-8_5X6 2145,3509 r180 bottom
Q10 "SOT23-3" SOT23-3 2508,1963.5 r0 top
Q11 "SOT23-3" SOT23-3 2640,1963.5 r0 top
Q12 "SOT23-3" SOT23-3 2772,1963.5 r0 top
Q13 "DFN-8_5X6" DFN-8_5X6 3503.5,2992 r90 top
Q14 "DFN-8_5X6" DFN-8_5X6 3503.94,2992.13 r90 bottom
Q15 "DFN-8_5X6" DFN-8_5X6 3503.5,2596 r90 top
Q16 "DFN-8_5X6" DFN-8_5X6 3503.5,2596 r90 bottom
Q17 "DFN-8_5X6" DFN-8_5X6 3503.5,2205.5 r90 top
Q18 "DFN-8_5X6" DFN-8_5X6 3503.5,2205.5 r90 bottom
Q19 "SOT23-3" SOT23-3 2282.5,1815 r270 top
Q20 "SOT23-3" SOT23-3 2282.5,1666.5 r270 top
Q21 "SOT23-3" SOT23-3 2282.5,1523.5 r270 top
Q22 "DFN-8_5X6" DFN-8_5X6 3503.5,1771 r90 top
Q23 "DFN-8_5X6" DFN-8_5X6 3503.94,1771.65 r90 bottom
Q24 "DFN-8_5X6" DFN-8_5X6 3503.5,1342 r90 top
Q25 "DFN-8_5X6" DFN-8_5X6 3503.5,1342 r90 bottom
Q26 "DFN-8_5X6" DFN-8_5X6 3503.5,907.5 r90 top
Q27 "DFN-8_5X6" DFN-8_5X6 3503.5,907.5 r90 bottom
Q28 "SOT23-3" SOT23-3 742.5,1578.5 r270 top
Q29 "SOT23-3" SOT23-3 742.5,1452 r270 top
Q30 "SOT23-3" SOT23-3 742.5,1320 r270 top
Q31 "DFN-8_5X6" DFN-8_5X6 2128.5,434.5 r0 top
Q32 "DFN-8_5X6" DFN-8_5X6 2128.5,434.5 r0 bottom
Q33 "DFN-8_5X6" DFN-8_5X6 1732.5,434.5 r0 top
Q34 "DFN-8_5X6" DFN-8_5X6 1732.28,433.07 r0 bottom
Q35 "DFN-8_5X6" DFN-8_5X6 1336.5,434.5 r0 top
Q36 "DFN-8_5X6" DFN-8_5X6 1336.5,434.5 r0 bottom
R1 "0603R" 0603R 770,2216.5 r0 top
R2 "0603R" 0603R 896.5,2216.5 r0 top
R3 "0603R" 0603R 770,2150.5 r180 top
R4 "0603R" 0603R 896.5,2150.5 r0 top
R5 "0603R" 0603R 1226.5,2420 r270 top
R6 "0603R" 0603R 1226.5,2552 r270 top
R7 "0603R" 0603R 1226.5,2684 r270 top
R8 "0805R" 0805R 1166,3712.5 r180 top
R9 "0805R" 0805R 1199,3591.5 r270 top
R10 "0805R" 0805R 1155,3586 r0 bottom
R11 "0805R" 0805R 1193.5,3443 r270 bottom
R12 "0805R" 0805R 1562,3707 r180 top
R13 "0805R" 0805R 1600.5,3591.5 r270 top
R14 "0805R" 0805R 1556.5,3586 r0 bottom
R15 "0805R" 0805R 1589.5,3432 r270 bottom
R16 "0805R" 0805R 1963.5,3701.5 r180 top
R17 "0805R" 0805R 1996.5,3586 r270 top
R18 "0805R" 0805R 1952.5,3575 r0 bottom
R19 "0805R" 0805R 1996.5,3432 r270 bottom
R20 "0603R" 0603R 896.5,2018.5 r180 top
R21 "0603R" 0603R 770,2018.5 r0 top
R22 "0603R" 0603R 1023,1952.5 r180 top
R23 "0603R" 0603R 896.5,1952.5 r0 top
R24 "0603R" 0603R 1023,1886.5 r180 top
R25 "0603R" 0603R 1468.5,2684 r270 top
R26 "0603R" 0603R 1408,2684 r270 top
R27 "0603R" 0603R 1287,2684 r90 top
R28 "0603R" 0603R 1468.5,2552 r270 top
R29 "0603R" 0603R 1408,2552 r270 top
R30 "0603R" 0603R 1287,2552 r90 top
R31 "0603R" 0603R 1468.5,2420 r270 top
R32 "0603R" 0603R 1408,2420 r270 top
R33 "0603R" 0603R 1287,2420 r90 top
R34 "0603R" 0603R 132,2123 r270 top
R35 "2512R" 2512R 1754.28,3104.74 r90 bottom
R36 "0603R" 0603R 896.5,2084.5 r180 top
R37 "0805R" 0805R 313.5,2431 r270 bottom
R38 "0603R" 0603R 896.5,1886.5 r0 top
R39 "0603R" 0603R 528,2271.5 r0 top
R40 "0603R" 0603R 528,2337.5 r180 top
R41 "0603R" 0603R 1798.5,2398 r180 top
R42 "0603R" 0603R 1798.5,2332 r0 top
R43 "0603R" 0603R 1633.5,2161.5 r270 top
R44 "0603R" 0603R 1798.5,2266 r0 top
R45 "0603R" 0603R 2508,2073.5 r180 top
R46 "0603R" 0603R 2640,2073.5 r180 top
R47 "0603R" 0603R 2772,2073.5 r180 top
R48 "0805R" 0805R 3696,3179 r90 top
R49 "0805R" 0805R 3580.5,3140.5 r180 top
R50 "0805R" 0805R 3575,3195.5 r270 bottom
R51 "0805R" 0805R 3432,3151.5 r180 bottom
R52 "0805R" 0805R 3696,2783 r90 top
R53 "0805R" 0805R 3580.5,2750 r180 top
R54 "0805R" 0805R 3586,2783 r270 bottom
R55 "0805R" 0805R 3432,2744.5 r180 bottom
R56 "0805R" 0805R 3696,2387 r90 top
R57 "0805R" 0805R 3575,2354 r180 top
R58 "0805R" 0805R 3575,2403.5 r270 bottom
R59 "0805R" 0805R 3432,2354 r180 bottom
R60 "0603R" 0603R 1765.5,2161.5 r90 top
R61 "0603R" 0603R 1831.5,2161.5 r270 top
R62 "0603R" 0603R 1798.5,2068 r180 top
R63 "0603R" 0603R 1925,2068 r0 top
R64 "0603R" 0603R 1798.5,2002 r180 top
R65 "0603R" 0603R 2772,2337.5 r180 top
R66 "0603R" 0603R 2772,2271.5 r180 top
R67 "0603R" 0603R 2772,2139.5 r0 top
R68 "0603R" 0603R 2640,2337.5 r180 top
R69 "0603R" 0603R 2640,2271.5 r180 top
R70 "0603R" 0603R 2640,2139.5 r0 top
R71 "0603R" 0603R 2508,2337.5 r180 top
R72 "0603R" 0603R 2508,2271.5 r180 top
R73 "0603R" 0603R 2508,2139.5 r0 top
R74 "2512R" 2512R 3110.24,2598.43 r0 bottom
R75 "0603R" 0603R 1699.5,2161.5 r270 top
R76 "0603R" 0603R 1925,2002 r0 top
R77 "0603R" 0603R 1468.5,1754.5 r0 top
R78 "0603R" 0603R 1589.5,1754.5 r0 top
R79 "0603R" 0603R 1468.5,1688.5 r180 top
R80 "0603R" 0603R 1589.5,1688.5 r0 top
R81 "0603R" 0603R 2392.5,1809.5 r90 top
R82 "0603R" 0603R 2392.5,1666.5 r90 top
R83 "0603R" 0603R 2392.5,1523.5 r90 top
R84 "0805R" 0805R 3696,1963.5 r90 top
R85 "0805R" 0805R 3575,1925 r180 top
R86 "0805R" 0805R 3575,1958 r270 bottom
R87 "0805R" 0805R 3432,1919.5 r180 bottom
R88 "0805R" 0805R 3701.5,1534.5 r90 top
R89 "0805R" 0805R 3580.5,1496 r180 top
R90 "0805R" 0805R 3580.5,1529 r270 bottom
R91 "0805R" 0805R 3426.5,1490.5 r180 bottom
R92 "0805R" 0805R 3701.5,1100 r90 top
R93 "0805R" 0805R 3580.5,1061.5 r180 top
R94 "0805R" 0805R 3575,1100 r270 bottom
R95 "0805R" 0805R 3426.5,1056 r180 bottom
R96 "0603R" 0603R 1468.5,1556.5 r180 top
R97 "0603R" 0603R 1589.5,1556.5 r0 top
R98 "0603R" 0603R 1589.5,1490.5 r180 top
R99 "0603R" 0603R 1710.5,1490.5 r0 top
R100 "0603R" 0603R 1589.5,1424.5 r180 top
R101 "0603R" 0603R 2656.5,1523.5 r90 top
R102 "0603R" 0603R 2590.5,1523.5 r90 top
R103 "0603R" 0603R 2458.5,1523.5 r270 top
R104 "0603R" 0603R 2656.5,1666.5 r90 top
R105 "0603R" 0603R 2590.5,1666.5 r90 top
R106 "0603R" 0603R 2458.5,1666.5 r270 top
R107 "0603R" 0603R 2656.5,1809.5 r90 top
R108 "0603R" 0603R 2590.5,1809.5 r90 top
R109 "0603R" 0603R 2458.5,1809.5 r270 top
R110 "2512R" 2512R 3110.24,1338.58 r0 bottom
R111 "0603R" 0603R 1589.5,1622.5 r180 top
R112 "0603R" 0603R 1710.5,1424.5 r0 top
R113 "0603R" 0603R 753.5,605 r90 top
R114 "0603R" 0603R 814,605 r90 top
R115 "0603R" 0603R 880,478.5 r270 top
R116 "0603R" 0603R 880,605 r90 top
R117 "0603R" 0603R 852.5,1584 r270 top
R118 "0603R" 0603R 852.5,1452 r90 top
R119 "0603R" 0603R 852.5,1320 r270 top
R120 "0805R" 0805R 2315.5,242 r0 top
R121 "0805R" 0805R 2277,357.5 r90 top
R122 "0805R" 0805R 2326.5,357.5 r180 bottom
R123 "0805R" 0805R 2277,500.5 r90 bottom
R124 "0805R" 0805R 1908.5,231 r0 top
R125 "0805R" 0805R 1875.5,352 r90 top
R126 "0805R" 0805R 1919.5,346.5 r180 bottom
R127 "0805R" 0805R 1881,506 r90 bottom
R128 "0805R" 0805R 1518,236.5 r0 top
R129 "0805R" 0805R 1479.5,357.5 r90 top
R130 "0805R" 0805R 1523.5,357.5 r180 bottom
R131 "0805R" 0805R 1485,506 r90 bottom
R132 "0603R" 0603R 1012,478.5 r270 top
R133 "0603R" 0603R 1012,605 r90 top
R134 "0603R" 0603R 1078,731.5 r270 top
R135 "0603R" 0603R 1078,605 r90 top
R136 "0603R" 0603R 1144,605 r270 top
R137 "0603R" 0603R 1116.5,1320 r270 top
R138 "0603R" 0603R 1050.5,1320 r270 top
R139 "0603R" 0603R 918.5,1320 r90 top
R140 "0603R" 0603R 1116.5,1452 r90 top
R141 "0603R" 0603R 1050.5,1452 r90 top
R142 "0603R" 0603R 918.5,1452 r270 top
R143 "0603R" 0603R 1116.5,1584 r270 top
R144 "0603R" 0603R 1050.5,1584 r270 top
R145 "0603R" 0603R 918.5,1584 r90 top
R146 "2512R" 2512R 1732.28,826.77 r270 bottom
R147 "0603R" 0603R 946,605 r270 top
R148 "0603R" 0603R 1144,731.5 r90 top
U1 "QFN-24_L4.0-W4.0-P0.50-BL-EP2.6" QFN-24_L4.0-W4.0-P0.50-BL-EP2.6 1683,2596 r0 top
U2 "SSOP20-25-150-1" SSOP20-25-150-1 1281.5,2134 r270 top
U3 "ESOP-8_L4.9-W3.9-P1.27" ESOP-8_L4.9-W3.9-P1.27 319,2172.5 r90 top
U4 "SOT-223_L6.7-W3.5-P2.30-BR" SOT-223_L6.7-W3.5-P2.30-BR 324.5,1122 r0 top
U5 "SSOP20-25-150-1" SSOP20-25-150-1 1969,1589.5 r270 top
U6 "SSOP20-25-150-1" SSOP20-25-150-1 2150.5,2227.5 r270 top
U7 "QFN-24_L4.0-W4.0-P0.50-BL-EP2.6" QFN-24_L4.0-W4.0-P0.50-BL-EP2.6 2513.5,1276 r270 top
U8 "SSOP20-25-150-1" SSOP20-25-150-1 935,968 r0 top
U9 "QFN-24_L4.0-W4.0-P0.50-BL-EP2.6" QFN-24_L4.0-W4.0-P0.50-BL-EP2.6 2524.5,2629 r270 top
U10 "QFN-24_L4.0-W4.0-P0.50-BL-EP2.6" QFN-24_L4.0-W4.0-P0.50-BL-EP2.6 1419,1221 r270 top

## Footprints (in the part's own frame and the unit in brackets; to place one, negate y for a bottom-side part, rotate by r counter-clockwise, add the part's x,y. Pads: shape width x height; smd on the part's side, far side on the other; paste and mask are expansions set on the pad)
0603C [mil]
  rect 29.92x31.5 smd: 1(-29.92,0) 2(29.92,0)
  silkscreen extent -57,-28 57,28
0603R [mil]
  rect 29.92x31.5 smd: 1(-29.92,0) 2(29.92,0)
  silkscreen extent -57,-28 57,28
0805C [mm]
  rect 1x1 smd: 1(-1,0) 2(1,0)
  silkscreen extent -1.8,-0.8 1.8,0.8
0805R [mm]
  rect 1x1 smd: 1(-1,0) 2(1,0)
  silkscreen extent -1.8,-0.8 1.8,0.8
1206C [mil]
  rect 47.24x62.99 smd: 1(-59.06,0) 2(59.06,0)
  silkscreen extent -94,-43 94,43
1210C [mm]
  rect 1.6x2.7 smd: 1(-1.4,0) 2(1.4,0)
  silkscreen extent -2.5,-1.65 2.5,1.65
2512R [mm]
  rect 1.52x3.2 smd: 1(-3.3,0) 2(3.3,0)
  silkscreen extent -4.4,-1.9 4.4,1.9
CAP-SMD_BD10.0-L10.3-W10.3-FD [mm]
  rect 3.2x1.5 smd: 1(-4.5,0) 2(4.5,0)
  silkscreen extent -5.15,-5.15 5.15,5.15
DFN-8_5X6 [mm]
  rect 0.58x1.38 smd: 1(-1.905,-2.985) 2(-0.635,-2.985) 3(0.635,-2.985) 4(1.905,-2.985) 5(1.9,2.985) 6(0.64,2.985) 7(-0.63,2.985) 8(-1.9,2.985)
  rect 4.6x4.1 smd: 9(0,0.695)
  silkscreen extent -3.2,-2.89 2.6,2.9
ESOP-8_L4.9-W3.9-P1.27 [mil]
  rect 18.9x51.18 smd: 1(-75,-114.5) 2(-25,-114.5) 3(25,-114.5) 4(75,-114.5) 5(75,114.5) 6(25,114.5) 7(-25,114.5) 8(-75,114.5)
  rect 137.8x98.42 smd: 9(0,0)
  silkscreen extent -100,-81 100,81
HDR1X5 [mm]
  rect 1.5x1.5 hole 0.9: 1(0,0) 2(2.54,0) 3(5.08,0) 4(7.62,0) 5(10.16,0)
  silkscreen extent -1.27,-1.27 11.43,1.27
L-SMD-0630 [mm]
  rect 3x3.5 smd: 1(-3.175,0) 2(3.175,0)
  silkscreen extent -3.66,-3.48 3.66,3.48
QFN-24_L4.0-W4.0-P0.50-BL-EP2.6 [mm]
  oval 0.28x0.9 smd: 1(-1.25,-2.1) 2(-0.75,-2.1) 3(-0.25,-2.1) 4(0.25,-2.1) 5(0.75,-2.1) 6(1.25,-2.1) 13(1.25,2.1) 14(0.75,2.1) 15(0.25,2.1) 16(-0.25,2.1) 17(-0.75,2.1) 18(-1.242,2.1)
  oval 0.9x0.28 smd: 7(2.1,-1.25) 8(2.1,-0.75) 9(2.1,-0.25) 10(2.1,0.25) 11(2.1,0.75) 12(2.1,1.25) 19(-2.1,1.25) 20(-2.1,0.75) 21(-2.1,0.25) 22(-2.1,-0.25) 23(-2.1,-0.75) 24(-2.1,-1.25)
  rect 2.7x2.7 smd: 25(0.013,0)
  silkscreen extent -2.14,-2.15 2.16,2.15
SOD-323_L1.8-W1.3-LS2.5-RD [mm]
  rect 1x1 smd: 1(-1.2,0) 2(1.2,0)
  silkscreen extent -1,-0.8 1,0.8
SOT23-3 [mm]
  rect 1x1.4 smd: 1(-0.95,-1.1) 2(0.95,-1.1) 3(0,1.1)
  silkscreen extent -1.4,-0.7 1.4,0.7
SOT-223_L6.7-W3.5-P2.30-BR [mm]
  rect 2.2x1.1 smd: 1(3.099,-2.3) 2(3.099,0) 3(3.099,2.3)
  rect 2.2x3.5 smd: 4(-3.099,0)
  silkscreen extent -1.8,-3.55 1.8,3.55
SSOP20-25-150-1 [mm]
  oval 0.35x2 smd: 1(-2.857,-2.6) 2(-2.222,-2.6) 3(-1.587,-2.6) 4(-0.952,-2.6) 5(-0.317,-2.6) 6(0.318,-2.6) 7(0.953,-2.6) 8(1.588,-2.6) 9(2.223,-2.6) 10(2.858,-2.6) 11(2.857,2.6) 12(2.222,2.6) 13(1.587,2.6) 14(0.952,2.6) 15(0.317,2.6) 16(-0.318,2.6) 17(-0.953,2.6) 18(-1.588,2.6) 19(-2.223,2.6) 20(-2.858,2.6)
  silkscreen extent -4.4,-2.87 4.4,1.3

## Via types
v1: diameter 34, hole 21, Top to Bottom, 505 vias
v2: diameter 24, hole 12, Top to Bottom, 272 vias
v3: diameter 30, hole 17, Top to Bottom, 132 vias

## Nets (pads, with @x,y where several pads share a name; then routed paths per layer and width w, separated by ;. In a path a pad name is that pad's centre, name@x,y a point inside that pad or via, vN(x,y) a via of type N, cw(c..) or ccw(c..) an arc to the next point about the centre after c; other vN are vias at no path point)
$$$0: R119.1 | length 79.1
  Top w10: 785.81,1320 793.68,1320 823.6,1349.92 R119.1@852.5,1349.92
$$$1: D31.2 Q31.4 R120.2 R121.1 | length 228
  Top w20: Q31.4@2203.5,316.99 2235.55,316.99 2236.68,318.13 R121.1@2277,318.13 2354,318.13 D31.2@2354,310.26 2354,242 R120.2@2354.87,242
$$$2: D32.2 Q32.4 R122.2 R123.1 | length 341.4
  Bottom w20: Q32.4@2203.5,552.01 2203.5,534.63 R123.1@2277,461.13 ; R122.2@2287.13,357.5 2271.5,363 2249.5,385 2249.5,433.63 R123.1@2277,461.13 ; D32.2@2354,453.26 2277,453.26 R123.1@2277,461.13
$$$3: D33.2 Q33.4 R124.2 R125.1 | length 235.6
  Top w20: Q33.4@1807.5,316.99 1875.5,316.99 R125.1@1875.5,312.63 1952.5,312.63 D33.2@1952.5,304.76 1952.5,231 R124.2@1947.87,231
$$$4: D34.2 Q34.4 R126.2 R127.1 | length 342
  Bottom w20: Q34.4@1807.28,550.58 1807.28,540.35 R127.1@1881,466.63 ; R126.2@1880.13,346.5 1853.37,373.26 1853.37,385.57 1853.5,385.69 1853.5,439.13 R127.1@1881,466.63 ; D34.2@1958,458.76 1958,466.63 R127.1@1881,466.63
$$$5: D35.2 Q35.4 R128.2 R129.1 | length 228.6
  Top w20: Q35.4@1411.5,316.99 1479.5,316.99 R129.1@1479.5,318.13 1556.5,318.13 D35.2@1556.5,310.26 1556.5,236.5 R128.2@1557.37,236.5
$$$6: D36.2 Q36.4 R130.2 R131.1 | length 332.4
  Bottom w20: Q36.4@1411.5,552.01 1411.5,540.13 R131.1@1485,466.63 ; R130.2@1484.13,357.5 1484.26,357.5 1484.26,357.63 1457.5,384.38 1457.5,439.13 R131.1@1485,466.63 ; D36.2@1562,458.76 1562,466.63 R131.1@1485,466.63
$$$4375: R81.1 | length 81.4
  Top w10: 2325.81,1815 2356.29,1815 2391.71,1779.58 R81.1@2392.5,1779.58
$$$4376: R82.1 | length 79.1
  Top w10: 2325.81,1666.5 2361.79,1666.5 2391.71,1636.58 R82.1@2392.5,1636.58
$$$4377: R83.1 | length 79.1
  Top w10: 2325.81,1523.5 2361.79,1523.5 2391.71,1493.58 R83.1@2392.5,1493.58
$$$4378: D22.2 Q22.4 R84.2 R85.1 | length 245.9
  Top w20: Q22.4@3621.01,1846 3621.01,1878.99 3614.37,1885.63 R85.1@3614.37,1925 3614.37,1962.31 3622.24,1970.19 D22.2@3622.24,2007.5 3696,2007.5 R84.2@3696,2002.87
$$$4379: D23.2 Q23.4 R86.2 R87.1 | length 326.3
  Bottom w20: Q23.4@3386.43,1846.65 3398.52,1846.65 R87.1@3471.37,1919.5 ; D23.2@3479.24,2002 3479.24,1964.69 3471.37,1956.81 R87.1@3471.37,1919.5 ; R86.2@3575,1918.63 3575,1911.97 3560.53,1897.5 3493.37,1897.5 R87.1@3471.37,1919.5
$$$4380: D24.2 Q24.4 R88.2 R89.1 | length 239
  Top w20: Q24.4@3621.01,1417 3621.01,1449.99 3619.87,1451.13 R89.1@3619.87,1496 3619.87,1573 D24.2@3627.74,1573 3701.5,1573 R88.2@3701.5,1573.87
$$$4381: D25.2 Q25.4 R90.2 R91.1 | length 327.9
  Bottom w20: Q25.4@3385.99,1417 3392.37,1417 R91.1@3465.87,1490.5 ; D25.2@3473.74,1567.5 3465.87,1567.5 R91.1@3465.87,1490.5 ; R90.2@3580.5,1489.63 3580.5,1489.76 3580.37,1489.76 3559.12,1468.5 3487.87,1468.5 R91.1@3465.87,1490.5
$$$4382: D26.2 Q26.4 R92.2 R93.1 | length 243.6
  Top w20: Q26.4@3621.01,982.5 3621.01,1015.49 3619.87,1016.63 R93.1@3619.87,1061.5 3619.87,1098.81 3627.74,1106.69 D26.2@3627.74,1144 3701.5,1144 R92.2@3701.5,1139.37
$$$4383: D27.2 Q27.4 R94.2 R95.1 | length 323.6
  Bottom w20: Q27.4@3385.99,982.5 3392.37,982.5 R95.1@3465.87,1056 ; D27.2@3473.74,1133 3465.87,1133 R95.1@3465.87,1056 ; R94.2@3575,1060.63 3575,1050.94 3565.32,1050.94 3542.62,1039.5 3492.5,1039.5 3476,1056 R95.1@3465.87,1056
$$$11129: R34.1 U3.7 | length 74.7
  Top w10: R34.1@132,2152.92 160.62,2152.92 166.04,2147.5 U3.7@204.5,2147.5
$$$11219: C42.1 U3.2
$$$11220: C42.2 L1.1 U3.1
$$$11350: R39.1 R40.2 U3.4 | length 140.5
  Top w12: U3.4@433.5,2247.5 474.08,2247.5 R39.1@498.08,2271.5 R40.2@498.08,2337.5
$$$11357: C43.2 U3.3 | length 67.9
  Top w12: U3.3@433.5,2197.5 487,2197.5 495,2205.5 C43.2@498.08,2205.5
$$$13508: R45.1 | length 79.1
  Top w10: 2508,2006.81 2508,2042.79 2537.92,2072.71 R45.1@2537.92,2073.5
$$$13509: R46.1 | length 79.1
  Top w10: 2640,2006.81 2640,2042.79 2669.92,2072.71 R46.1@2669.92,2073.5
$$$13510: R47.1 | length 79.1
  Top w10: 2772,2006.81 2772,2042.79 2801.92,2072.71 R47.1@2801.92,2073.5
$$$13511: D13.2 Q13.4 R48.2 R49.1 | length 228
  Top w20: Q13.4@3621.01,3067 3621.01,3099.99 3619.87,3101.13 R49.1@3619.87,3140.5 3627.74,3140.5 D13.2@3627.74,3217.5 3696,3217.5 R48.2@3696,3218.37
$$$13512: D14.2 Q14.4 R50.2 R51.1 | length 351.9
  Bottom w20: Q14.4@3386.43,3067.13 3387,3067.13 R51.1@3471.37,3151.5 ; D14.2@3479.24,3234 3479.24,3196.69 3471.37,3188.81 R51.1@3471.37,3151.5 ; R50.2@3575,3156.13 3575,3152.07 3580.47,3152.07 3546.91,3118.5 3504.37,3118.5 R51.1@3471.37,3151.5
$$$13513: D15.2 Q15.4 R52.2 R53.1 | length 237.2
  Top w20: Q15.4@3621.01,2671 3621.01,2703.99 3619.87,2705.13 R53.1@3619.87,2750 3627.74,2750 D15.2@3627.74,2827 3696,2827 R52.2@3696,2822.37
$$$13514: D16.2 Q16.4 R54.2 R55.1 | length 328.6
  Bottom w20: Q16.4@3385.99,2671 3397.87,2671 R55.1@3471.37,2744.5 ; D16.2@3479.24,2821.5 3471.37,2821.5 R55.1@3471.37,2744.5 ; R54.2@3586,2743.63 3579.63,2743.63 3564,2728 3487.87,2728 R55.1@3471.37,2744.5
$$$13515: D17.2 Q17.4 R56.2 R57.1 | length 230.2
  Top w20: Q17.4@3621.01,2280.5 3621.01,2307.99 3614.37,2314.63 R57.1@3614.37,2354 3622.24,2354 D17.2@3622.24,2425.5 3696,2425.5 R56.2@3696,2426.37
$$$13516: D18.2 Q18.4 R58.2 R59.1 | length 330.7
  Bottom w20: Q18.4@3385.99,2280.5 3397.87,2280.5 R59.1@3471.37,2354 ; D18.2@3479.24,2431 3471.37,2431 R59.1@3471.37,2354 ; R58.2@3575,2364.13 3538.11,2327.24 3498.13,2327.24 R59.1@3471.37,2354
$$$14267: R5.1 | length 82.3
  Top w10: 1154.31,2425.5 1163.58,2425.5 1188,2449.92 R5.1@1226.5,2449.92
$$$14327: R6.1 | length 84.6
  Top w10: 1154.31,2552 1162.18,2552 1192.1,2581.92 R6.1@1226.5,2581.92
$$$14335: R7.1 | length 90.9
  Top w10: 1154.31,2689.5 1154.31,2704.18 1176.87,2704.18 1186.6,2713.92 R7.1@1226.5,2713.92
$$$14677: D4.2 Q1.4 R8.2 R9.1 | length 228
  Top w20: R8.2@1126.63,3712.5 1127.5,3712.5 D4.2@1127.5,3644.24 1127.5,3637.56 1199,3637.56 R9.1@1199,3630.87 1238.37,3630.87 1239.51,3632.01 Q1.4@1272.5,3632.01
$$$14832: D5.2 Q5.4 R10.2 R11.1 | length 329.1
  Bottom w20: D5.2@1116.5,3490.24 1116.5,3482.37 R11.1@1193.5,3482.37 ; R10.2@1194.37,3586 1221.13,3559.24 1221.13,3510 R11.1@1193.5,3482.37 ; Q5.4@1272.5,3396.99 1272.5,3403.37 R11.1@1193.5,3482.37
$$$14976: D6.2 Q6.4 R12.2 R13.1 | length 226.4
  Top w20: R12.2@1522.63,3707 1529,3707 D6.2@1529,3638.74 1600.5,3638.74 R13.1@1600.5,3630.87 1600.5,3626.51 Q6.4@1668.5,3626.51
$$$14977: D7.2 Q7.4 R14.2 R15.1 | length 342.3
  Bottom w20: D7.2@1512.5,3484.74 1512.5,3478.06 1589.5,3478.06 R15.1@1589.5,3471.37 ; R14.2@1595.87,3586 1622.5,3559.37 1622.5,3504.37 R15.1@1589.5,3471.37 ; Q7.4@1668.5,3391.49 1668.5,3392.37 R15.1@1589.5,3471.37
$$$15003: D8.2 Q8.4 R16.2 R17.1 | length 222.5
  Top w20: R16.2@1924.13,3701.5 1925,3701.5 D8.2@1925,3633.24 1925,3625.37 R17.1@1996.5,3625.37 2035.87,3625.37 2037.01,3626.51 Q8.4@2070,3626.51
$$$15004: D9.2 Q9.4 R18.2 R19.1 | length 320.3
  Bottom w20: D9.2@1914,3479.24 1914,3471.37 R19.1@1996.5,3471.37 ; R18.2@1991.87,3575 2018.5,3526.37 2018.5,3493.37 R19.1@1996.5,3471.37 ; Q9.4@2070,3391.49 2070,3397.87 R19.1@1996.5,3471.37
$$$32765: R117.1 | length 81.4
  Top w10: 785.81,1578.5 793.68,1578.5 829.1,1613.92 R117.1@852.5,1613.92
$$$32766: R118.1 | length 79.1
  Top w10: 785.81,1452 821.79,1452 851.71,1422.08 R118.1@852.5,1422.08
AGND: C1.2 C3.2 C4.2 C5.2 C6.2 C13.2 C14.2 C15.2 C16.2 C17.2 C18.2 C19.2 C20.2 C21.2 C22.2 C23.2 C24.2 C25.2 C26.2 C27.2 C28.2 C29.2 C43.1 C44.2 C45.2 C46.2 C47.2 C48.2 C55.2 C56.2 C57.2 C58.2 C59.2 C60.2 C61.2 C62.2 C63.2 C64.2 C65.2 C72.2 C73.2 C74.2 C75.2 C76.2 C77.2 C86.2 C87.2 C88.2 C89.2 C90.2 C91.2 C98.2 C99.2 C100.2 C101.2 C102.2 J1.2 J2.2 J3.2 J4.2 R2.1 R4.1 R21.1 R23.1 R26.1 R29.1 R32.1 R37.2 R40.1 R42.1 R44.1 R61.1 R63.1 R66.1 R69.1 R72.1 R78.1 R80.1 R97.1 R99.1 R102.1 R105.1 R108.1 R114.1 R116.1 R133.1 R135.1 R138.1 R141.1 R144.1 U1.6 U1.25 U2.4 U3.9 U4.1 U5.4 U6.4 U7.6 U7.25 U8.4 U9.6 U9.25 U10.6 U10.25 | length 2331.6
  Top w4: v2(946,693) C102.2@946,701.58 ; v2(2794,1941.5) 2809.4,1926.1 2809.4,1920.19
  Top w10: v2(544.5,2205.5) C43.1@557.92,2205.5 ; v2(550,2337.5) R40.1@557.92,2337.5 ; v2(682,1281.5) 683.1,1282.6 699.19,1282.6 ; v2(682,1413.5) 683.1,1414.6 699.19,1414.6 ; v2(682,1540) 683.1,1541.1 699.19,1541.1 ; v2(726,2018.5) R21.1@740.08,2018.5 ; v2(814,566.5) R114.1@814,575.08 ; v2(814,693) C87.2@814,701.58 ; v2(852.5,1952.5) R23.1@866.58,1952.5 ; v2(852.5,2150.5) R4.1@866.58,2150.5 ; v2(852.5,2216.5) R2.1@866.58,2216.5 ; v2(880,566.5) R116.1@880,575.08 ; v2(880,693) C86.2@880,701.58 ; v2(891,924) 897.5,898.12 U8.4@897.5,865.64 ; v2(979,2018.5) C13.2@993.08,2018.5 ; v2(979,2084.5) C29.2@993.08,2084.5 ; v2(979,2150.5) C3.2@993.08,2150.5 ; v2(979,2216.5) C1.2@993.08,2216.5 ; C99.2@984.5,1349.92 v2(984.5,1386) C100.2@984.5,1422.08 ; C101.2@984.5,1613.92 v2(984.5,1650) ; v2(1012,566.5) R133.1@1012,575.08 ; v2(1012,693) C98.2@1012,701.58 ; R138.1@1050.5,1349.92 v2(1050.5,1386) R141.1@1050.5,1422.08 ; R144.1@1050.5,1613.92 v2(1050.5,1650) ; v2(1050.5,2381.5) 1057.1,2388.1 1067.69,2388.1 ; v2(1050.5,2508) 1057.1,2514.6 1067.69,2514.6 ; v2(1050.5,2645.5) 1057.1,2652.1 1067.69,2652.1 ; v2(1078,566.5) R135.1@1078,575.08 ; U2.4@1179.14,2171.5 1211.62,2171.5 v2(1237.5,2178) ; C91.2@1287,1136.08 1287,1135.8 1288.07,1135.8 1324.09,1171.82 U10.6@1336.32,1171.79 ; C16.2@1347.5,2449.92 v2(1347.5,2480.5) ; C15.2@1347.5,2581.92 v2(1347.5,2612.5) ; C14.2@1347.5,2713.92 v2(1347.5,2744.5) ; R32.1@1408,2449.92 v2(1408,2480.5) ; R29.1@1408,2581.92 v2(1408,2612.5) ; R26.1@1408,2713.92 v2(1408,2744.5) ; v2(1551,1556.5) R97.1@1559.58,1556.5 ; v2(1551,1688.5) R80.1@1559.58,1688.5 ; v2(1551,1754.5) R78.1@1559.58,1754.5 ; v2(1672,1490.5) R99.1@1680.58,1490.5 ; v2(1672,1556.5) C72.2@1680.58,1556.5 ; v2(1672,1622.5) C76.2@1680.58,1622.5 ; v2(1672,1688.5) C60.2@1680.58,1688.5 ; v2(1672,1754.5) C61.2@1680.58,1754.5 ; U1.6@1732.21,2513.32 1732.18,2501.09 1768.2,2465.07 1768.2,2464 C6.2@1767.92,2464 ; R44.1@1768.58,2266 v2(1782,2266) ; R42.1@1768.58,2332 v2(1782,2332) ; R61.1@1831.5,2191.42 v2(1831.5,2205.5) ; U5.4@1866.64,1627 1899.12,1627 v2(1925,1633.5) ; v2(1881,2068) R63.1@1895.08,2068 ; v2(1881,2134) C55.2@1895.08,2134 ; v2(1881,2200) C59.2@1895.08,2200 ; v2(1881,2266) C25.2@1895.08,2266 ; v2(1881,2332) C26.2@1895.08,2332 ; U6.4@2048.14,2265 2080.62,2265 v2(2106.5,2271.5) ; v2(2222,1628) 2223.1,1629.1 2239.19,1629.1 ; v2(2222,1776.5) 2223.1,1777.6 2239.19,1777.6 ; 2239.19,1486.1 2243.59,1490.5 v2(2255,1490.5) ; C64.2@2381.5,1191.08 2381.5,1190.8 2382.57,1190.8 2418.59,1226.82 U7.6@2430.82,1226.79 ; C47.2@2392.5,2544.08 2392.5,2543.8 2393.57,2543.8 2429.59,2579.82 U9.6@2441.82,2579.79 ; v2(2524.5,1479.5) C73.2@2524.5,1493.58 ; v2(2524.5,1622.5) C74.2@2524.5,1636.58 ; v2(2524.5,1765.5) C75.2@2524.5,1779.58 ; C58.2@2537.92,2205.5 v2(2546.5,2205.5) ; R72.1@2537.92,2271.5 v2(2546.5,2271.5) ; 2545.4,1920.19 2546.5,1919.09 v2(2546.5,1903) ; v2(2590.5,1479.5) R102.1@2590.5,1493.58 ; v2(2590.5,1622.5) R105.1@2590.5,1636.58 ; v2(2590.5,1765.5) R108.1@2590.5,1779.58 ; C57.2@2669.92,2205.5 v2(2684,2205.5) ; R69.1@2669.92,2271.5 v2(2684,2271.5) ; 2677.4,1920.19 2678.5,1919.09 v2(2678.5,1903) ; C56.2@2801.92,2205.5 v2(2816,2205.5) ; R66.1@2801.92,2271.5 v2(2816,2271.5) ; 2810.5,1936 2809.4,1934.9 2809.4,1920.19 ; 2809.4,1920.19 2809.4,1926.1 v2(2794,1941.5) 2797.91,1941.5 2797.91,1920.19 2809.4,1920.19
  Bottom w10: v3(374,2216.5) 385,2205.5 v2(544.5,2205.5) ; 374,2337.5 v2(550,2337.5) ; C88.2@883.08,885.5 891,885.5 v2(891,924) ; C4.2@1210,2180.42 v2@1237.5,2180.42 ; v2(1237.5,2178) v2@1237.5,2180.42 ; C5.2@1265,2180.42 v2@1237.5,2180.42 ; C62.2@1875.5,1641.42 C63.2@1930.5,1641.42 ; C27.2@2068,2284.92 C28.2@2123,2284.92 2109.58,2271.5 v2(2106.5,2271.5)
  other v2: 1309,1144 1419,1182.5 2403.5,1193.5 1419,1221 2546.5,1237.5 1419,1254 2546.5,1276 2546.5,1314.5 1760,2486 2414.5,2552 1644.5,2590.5 1683,2590.5 1721.5,2590.5 2530,2590.5 2563,2590.5 2530,2629 1644.5,2634.5 1721.5,2634.5 2530,2667.5 2563,2667.5
  other v3: 368.5,808.5 429,808.5 484,808.5 533.5,808.5 368.5,869 429,869 484,869 533.5,869 368.5,924 429,924 484,924 533.5,924 368.5,979 429,979 484,979 533.5,979 55,1292.5 121,1292.5 187,1292.5 253,1292.5 55,1347.5 121,1347.5 187,1347.5 253,1347.5 55,1402.5 121,1402.5 187,1402.5 253,1402.5 55,1463 121,1463 187,1463 253,1463 55,1523.5 121,1523.5 187,1523.5 253,1523.5 55,1584 121,1584 187,1584 253,1584 55,1644.5 121,1644.5 187,1644.5 253,1644.5 275,2035 324.5,2035 275,2084.5 324.5,2084.5 275,2134 324.5,2134 374,2134 302.5,2172.5 352,2172.5 275,2216.5 324.5,2216.5
EMF_1: R27.2 R30.2 R33.2 U2.18 | length 759.7
  Top w10: R33.2@1287,2449.92 v2(1287,2480.5) ; R30.2@1287,2581.92 v2(1287,2612.5) ; R27.2@1287,2713.92 v2(1287,2744.5) ; v2(1320,2194.5) 1320,2195.95 1383.86,2195.95 U2.18@1383.86,2196.5 1383.86,2197.41 1417.25,2197.41 U2.18@1420.16,2194.5
  Bottom w10: v2(1287,2744.5) v2(1287,2612.5) v2(1287,2480.5) 1320,2447.5 v2(1320,2194.5)
EMF_2: R67.2 R70.2 R73.2 U6.18 | length 670.3
  Top w4: v2(2535.5,2150.5) 2537.92,2148.08 R73.2@2537.92,2139.5 ; v2(2794,2150.5) 2801.92,2142.58 R67.2@2801.92,2139.5
  Top w10: U6.18@2285.85,2290.15 2252.86,2290.15 U6.18@2252.86,2290 2313.5,2290 v2(2315.5,2288) ; v2(2667.5,2150.5) 2669.92,2148.08 R70.2@2669.92,2139.5
  Bottom w10: v2(2315.5,2288) 2453,2150.5 v2(2535.5,2150.5) v2(2667.5,2150.5) v2(2794,2150.5)
EMF_3: R103.2 R106.2 R109.2 U5.18 | length 882.9
  Top w4: v2(2458.5,1479.5) R103.2@2458.5,1493.58
  Top w10: v2(2007.5,1661) 2016.5,1652 U5.18@2071.36,1652 ; v2(2458.5,1743.5) R109.2@2458.5,1779.58
  Bottom w10: v2(2007.5,1661) 2073.5,1661 2194.5,1540 2458.5,1540 ; v2(2458.5,1479.5) 2458.5,1540 ; v2(2458.5,1743.5) v2(2458.5,1617) 2458.5,1540
EMF_4: R139.2 R142.2 R145.2 U8.18 | length 634.8
  Top w10: U8.18@872.5,1070.36 872.5,1202.5 v2(918.5,1248.5) ; R139.2@918.5,1349.92 v2(918.5,1386) R142.2@918.5,1422.08 ; v2(918.5,1600.5) R145.2@918.5,1613.92
  Bottom w10: v2(918.5,1248.5) v2(918.5,1386) v2(918.5,1600.5)
EMF_ON_1: U2.7 | length 811
  Top w4: v2@1067.69,2462.9 1072.5,2458.09 v2(1072.5,2453)
  Top w10: v2@1067.69,2462.9 1067.69,2459.98 1078.48,2459.98 1111,2492.5 1111,2553.97 1075.57,2589.4 ; 1067.69,2589.4 1075.57,2589.4 ; 1067.69,2726.9 1075.57,2726.9 1111,2691.47 1111,2624.83 1075.57,2589.4 ; v2(1105.5,2095.5) 1106.5,2096.5 U2.7@1179.14,2096.5
  Bottom w10: v2(1072.5,2453) 1094.5,2431 1094.5,2106.5 v2(1105.5,2095.5)